# Altium PCB 701C USB Hub.PcbDoc (part 1 of 3)
Units mil, origin at the board's own origin, x right, y up, seen from the top; angles counter-clockwise.
Board outline 4055.12 x 2244.09 mil, 4 copper layers (Component Side, Ground Plane, Power Plane, Solder Side), stack 61 mil thick; 153 components, 125 nets, 650 pads, 241 vias.
Unrouted connection lines stored in the file: 208.
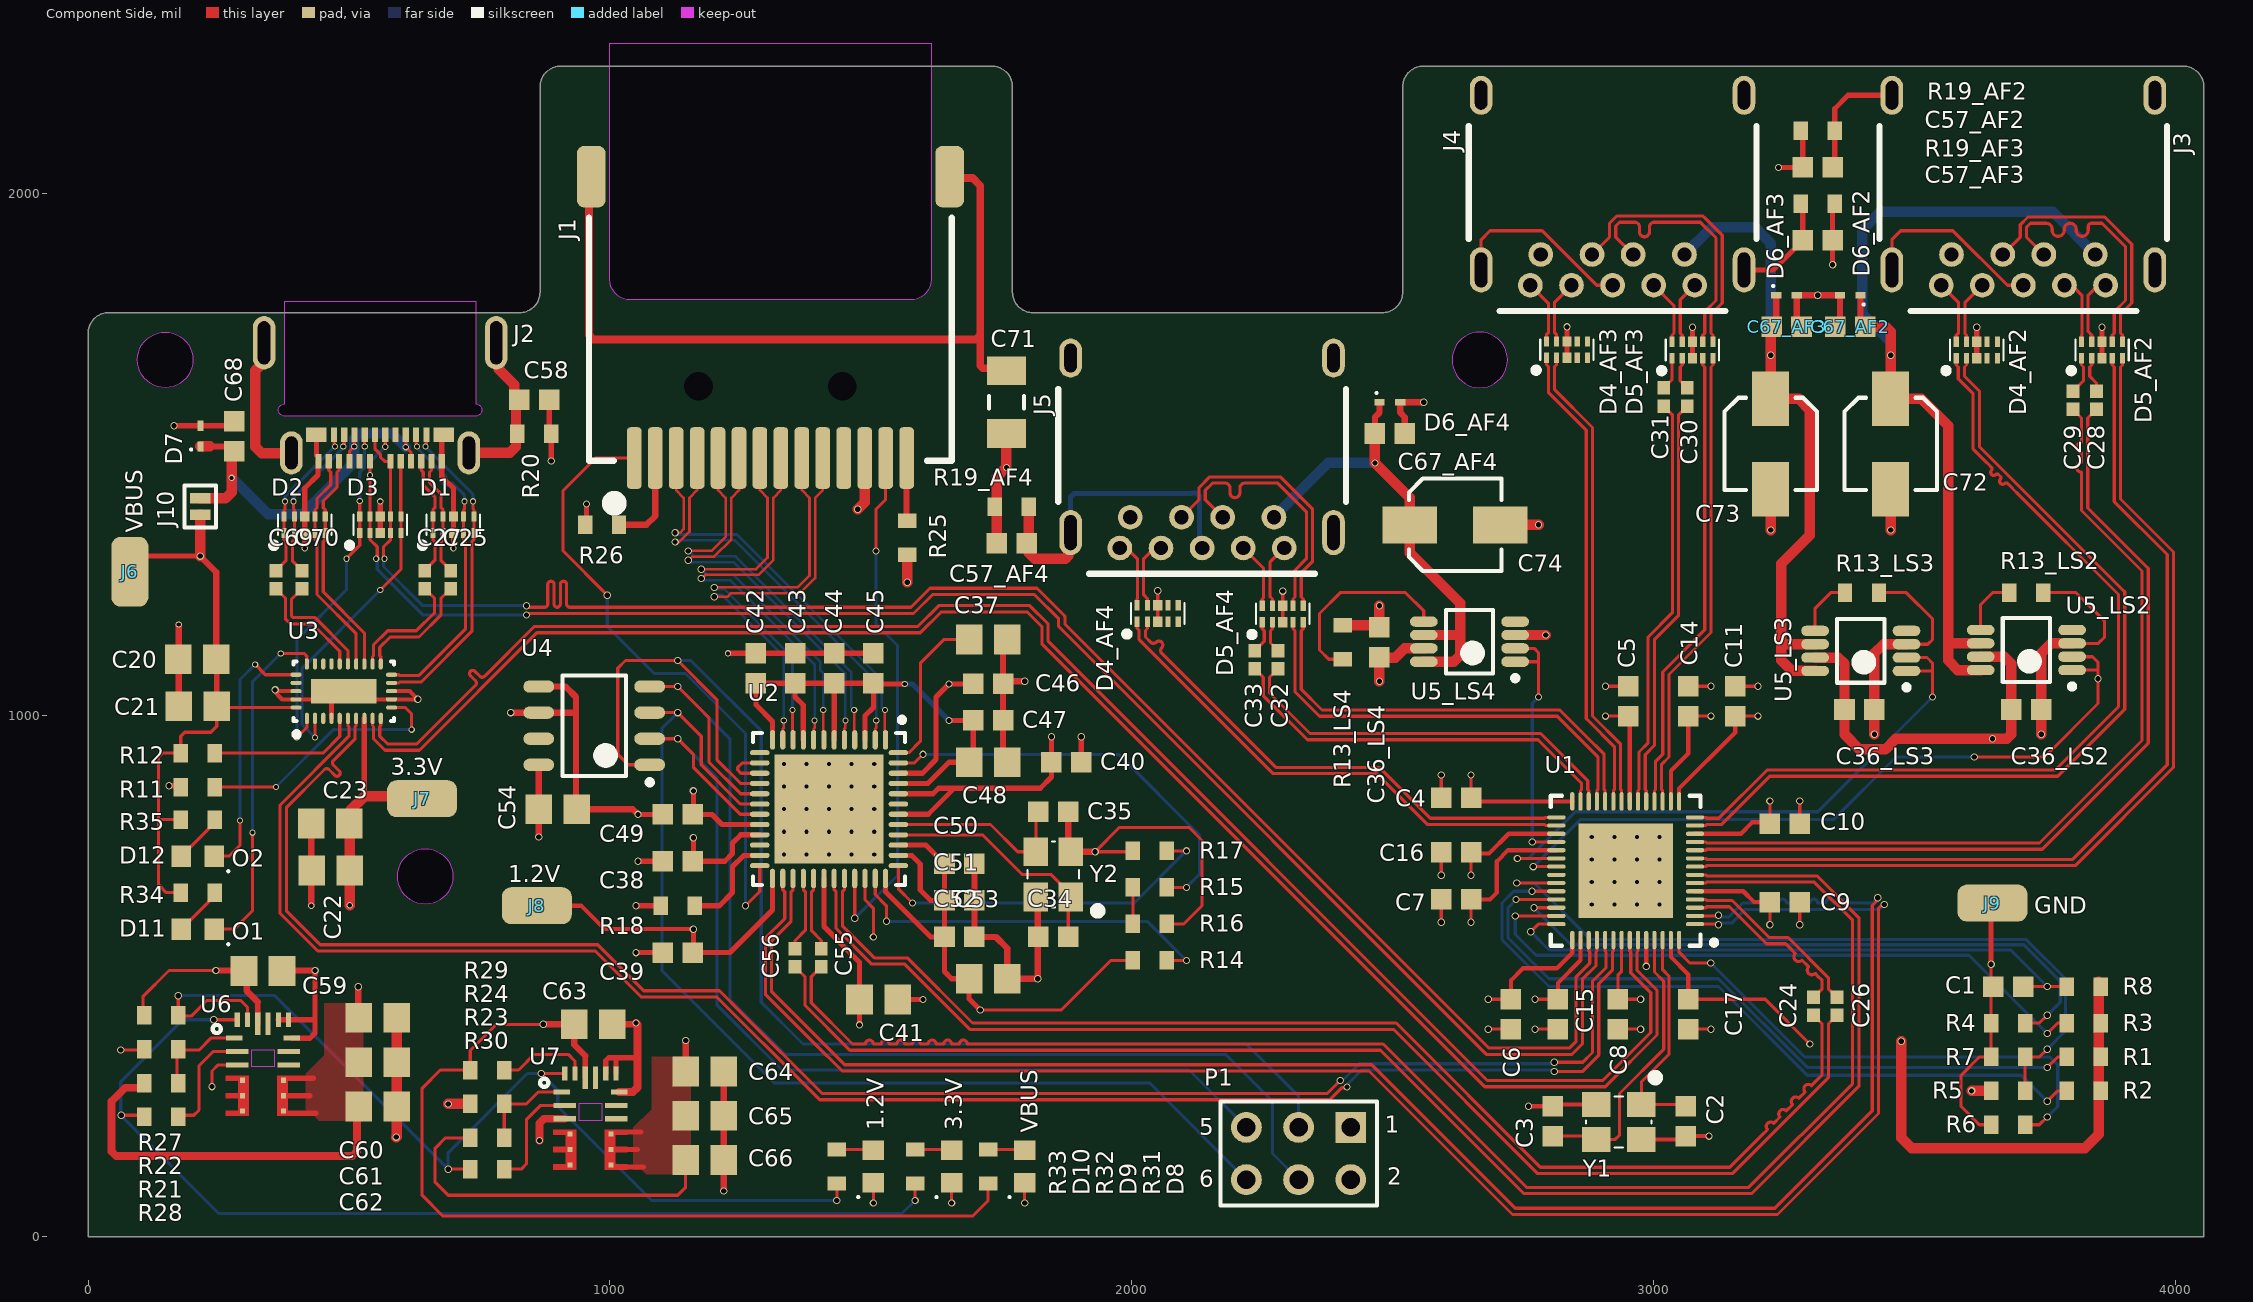
[diagram p0: Component Side view]
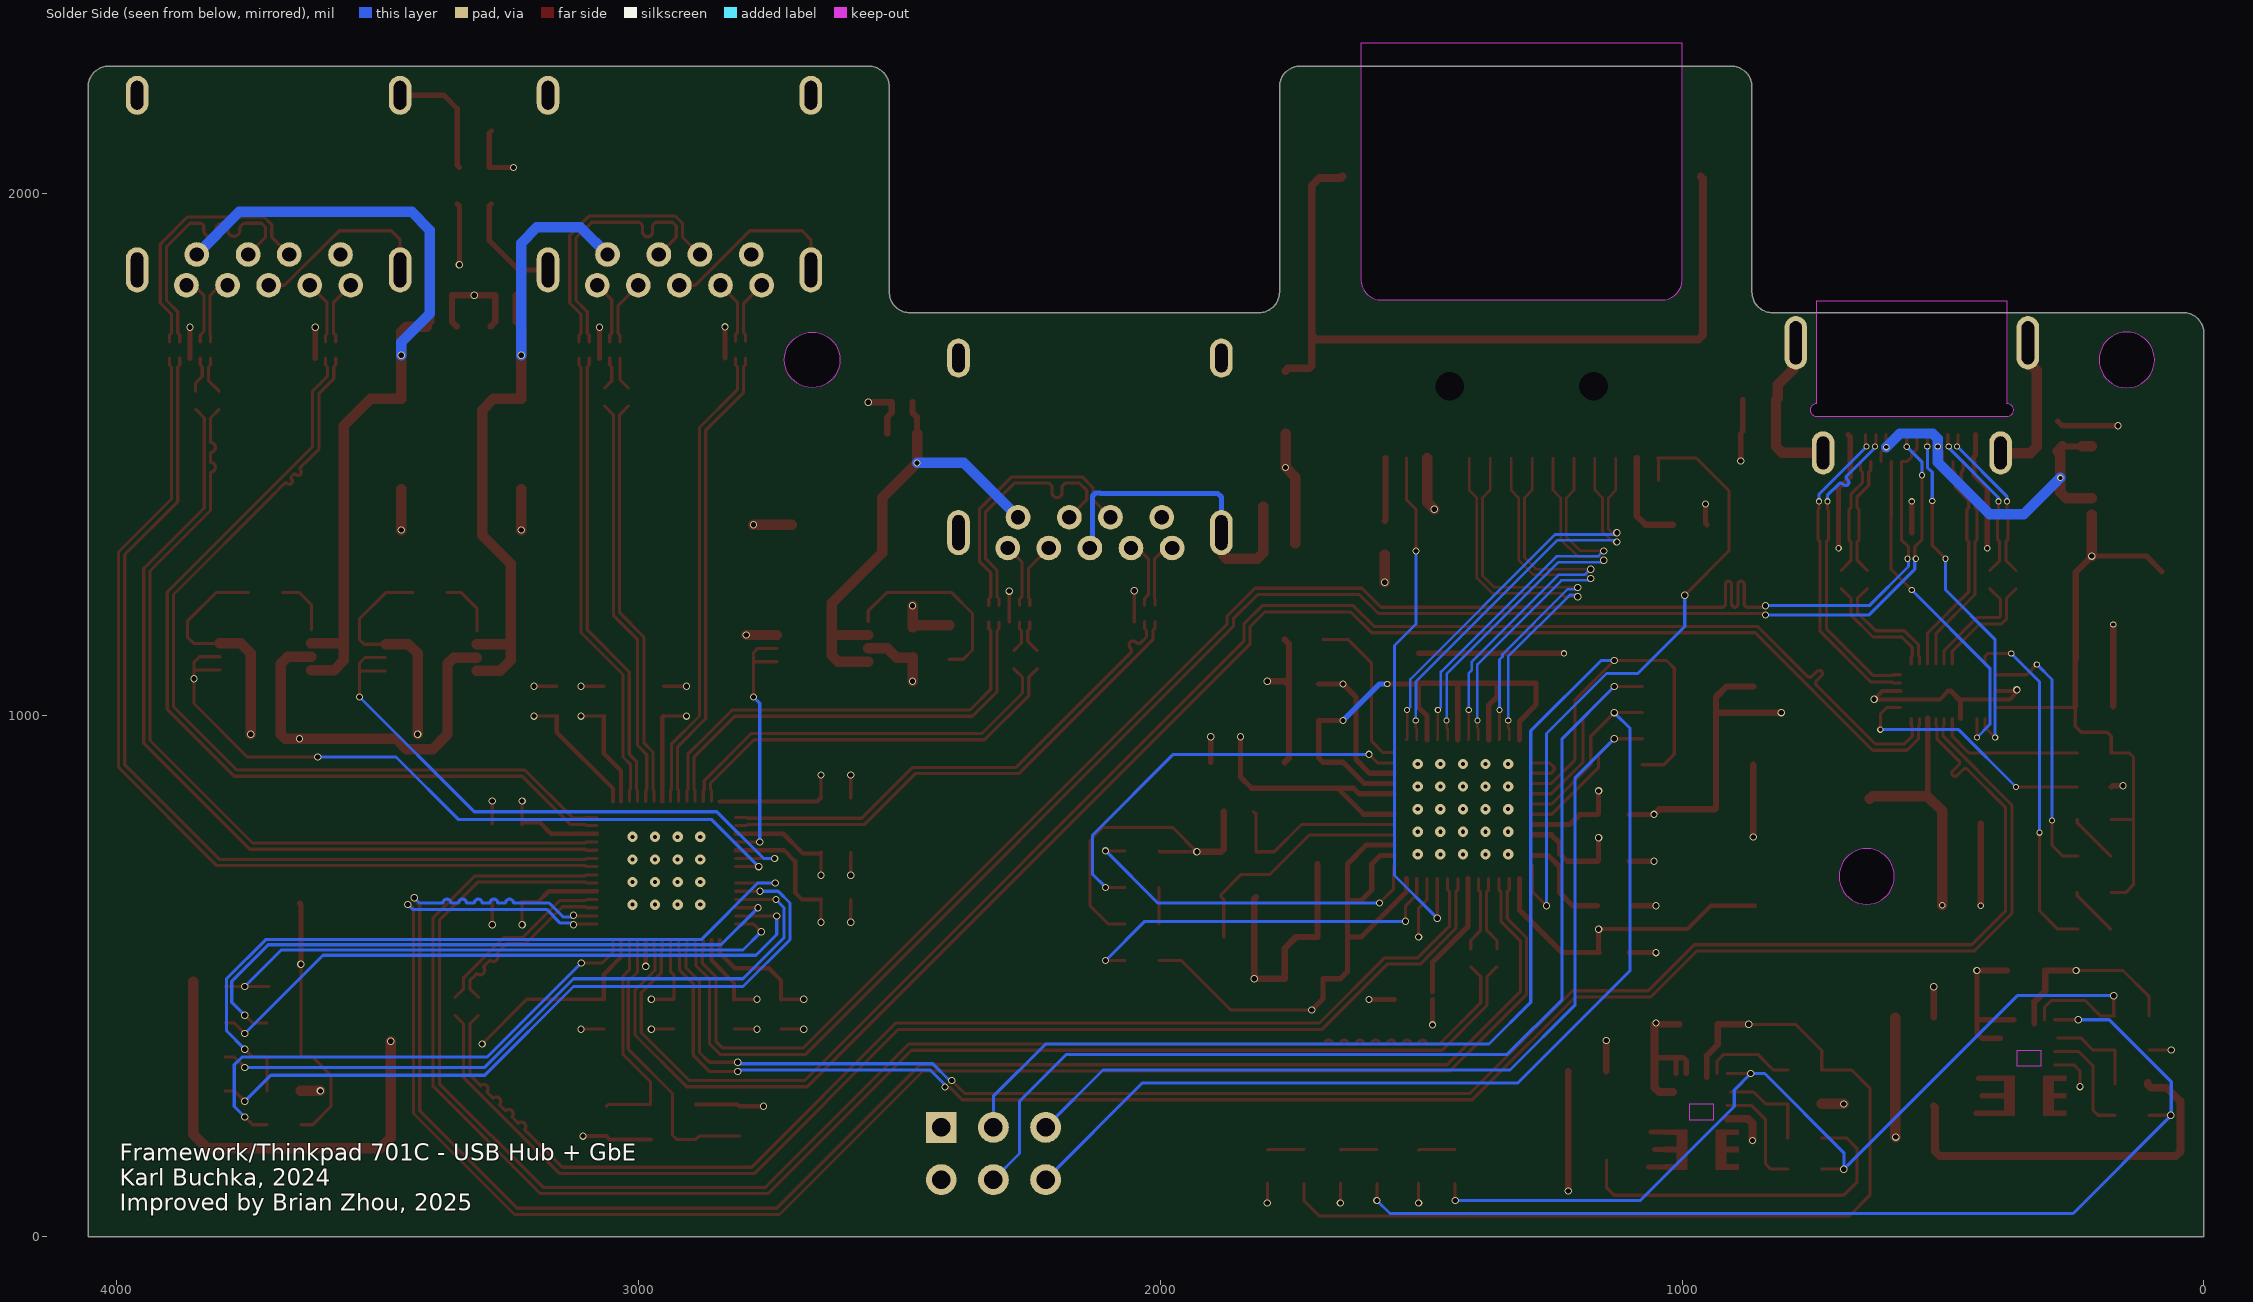
[diagram p1: Solder Side view, seen from below]
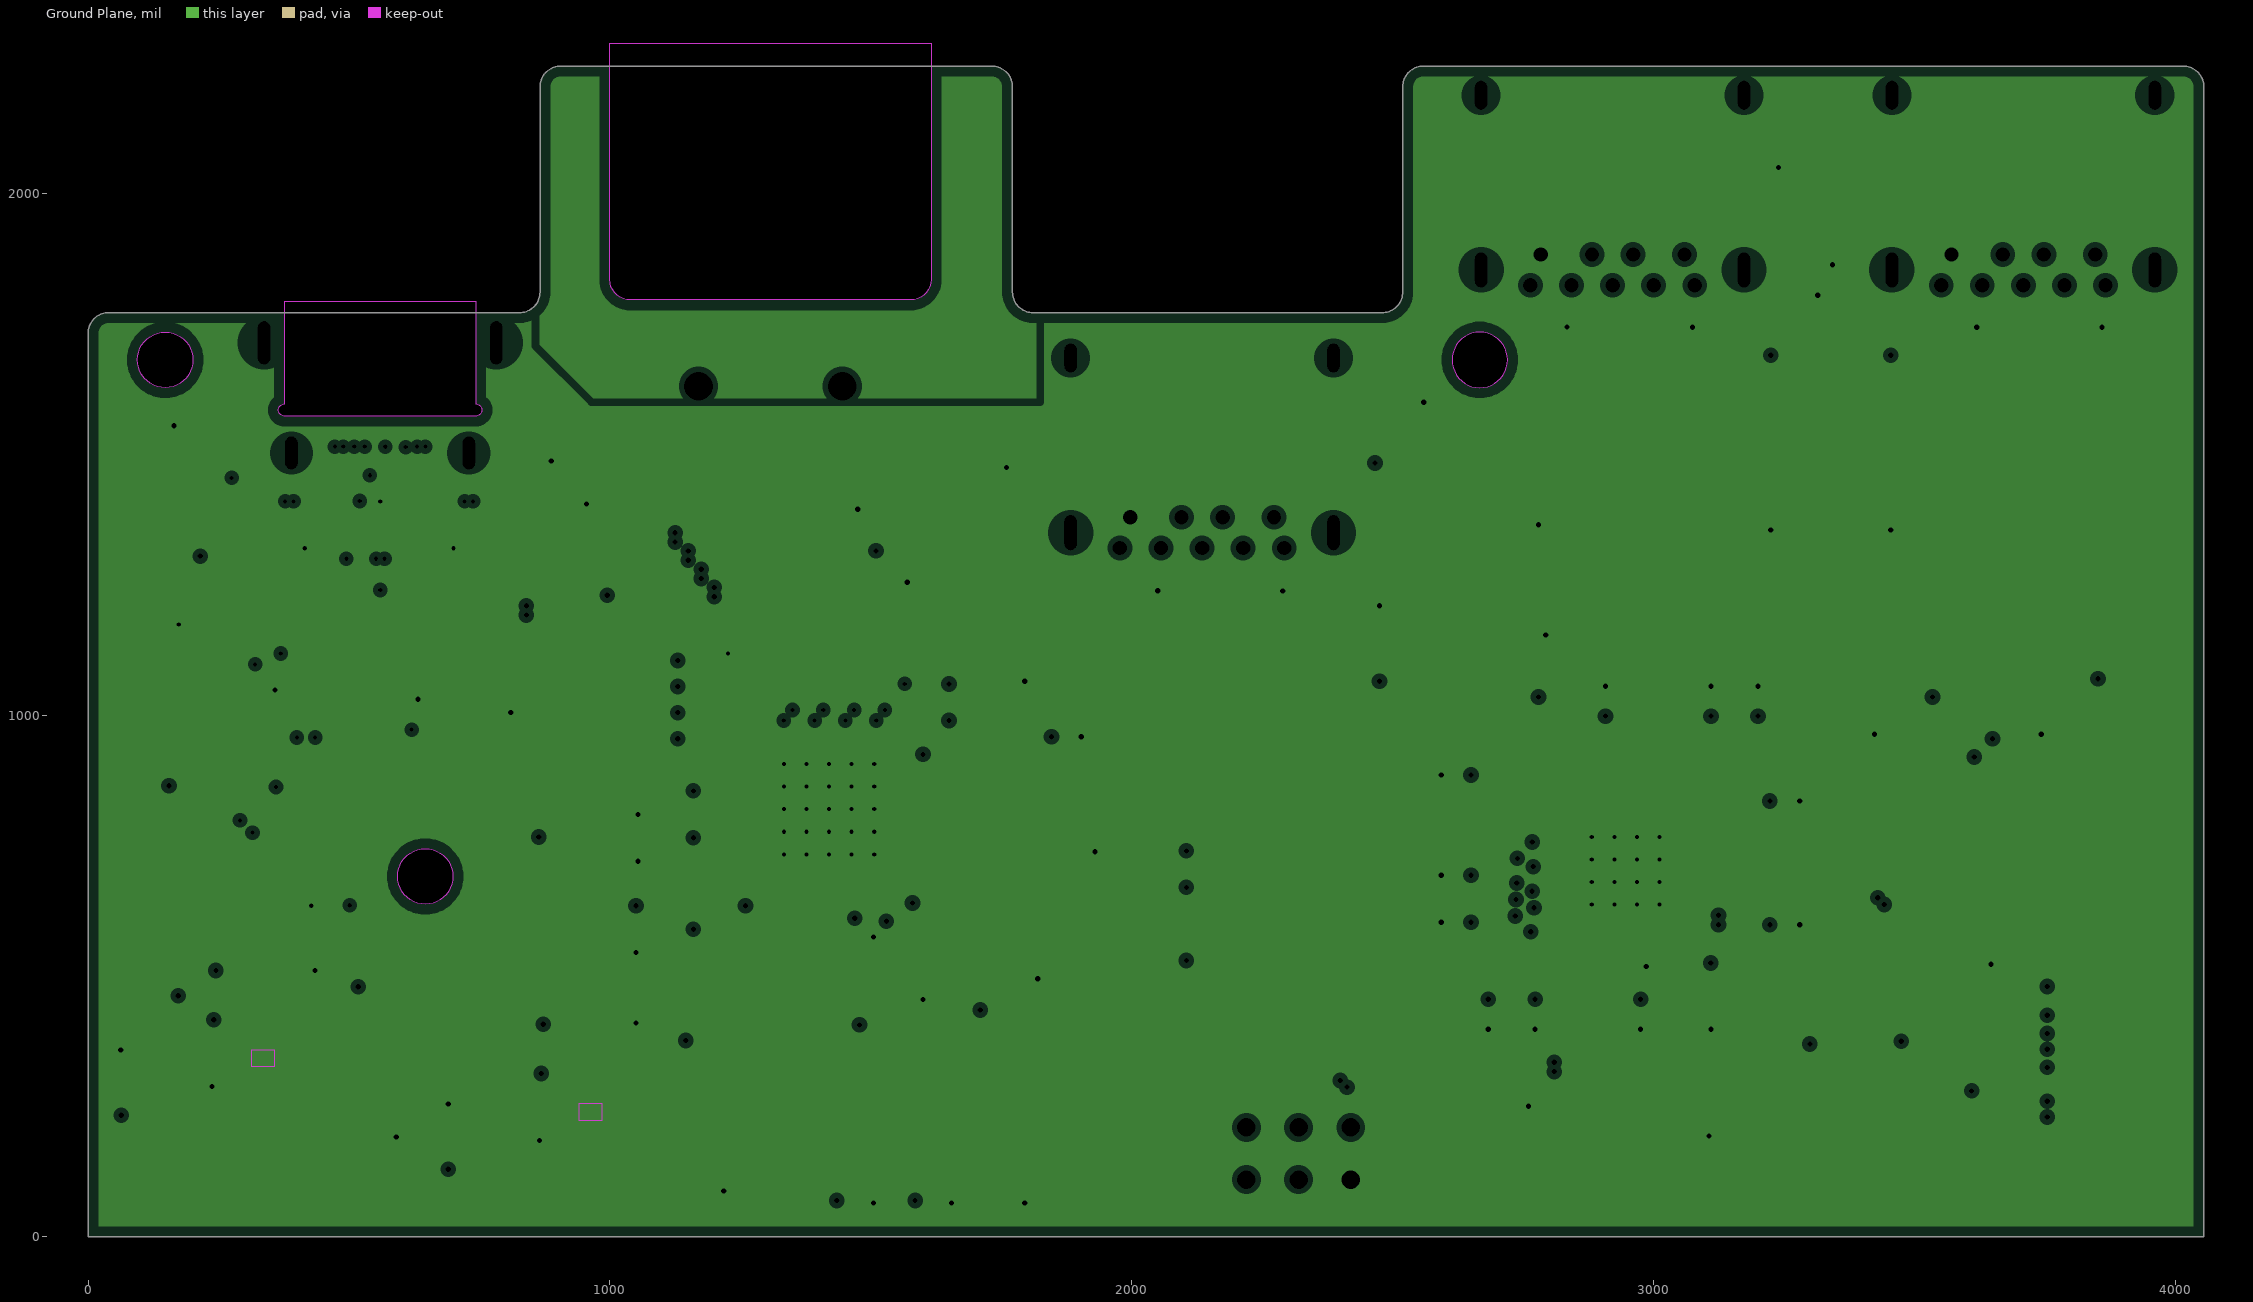
[diagram p2: Ground Plane, clearances drawn from the general rule]
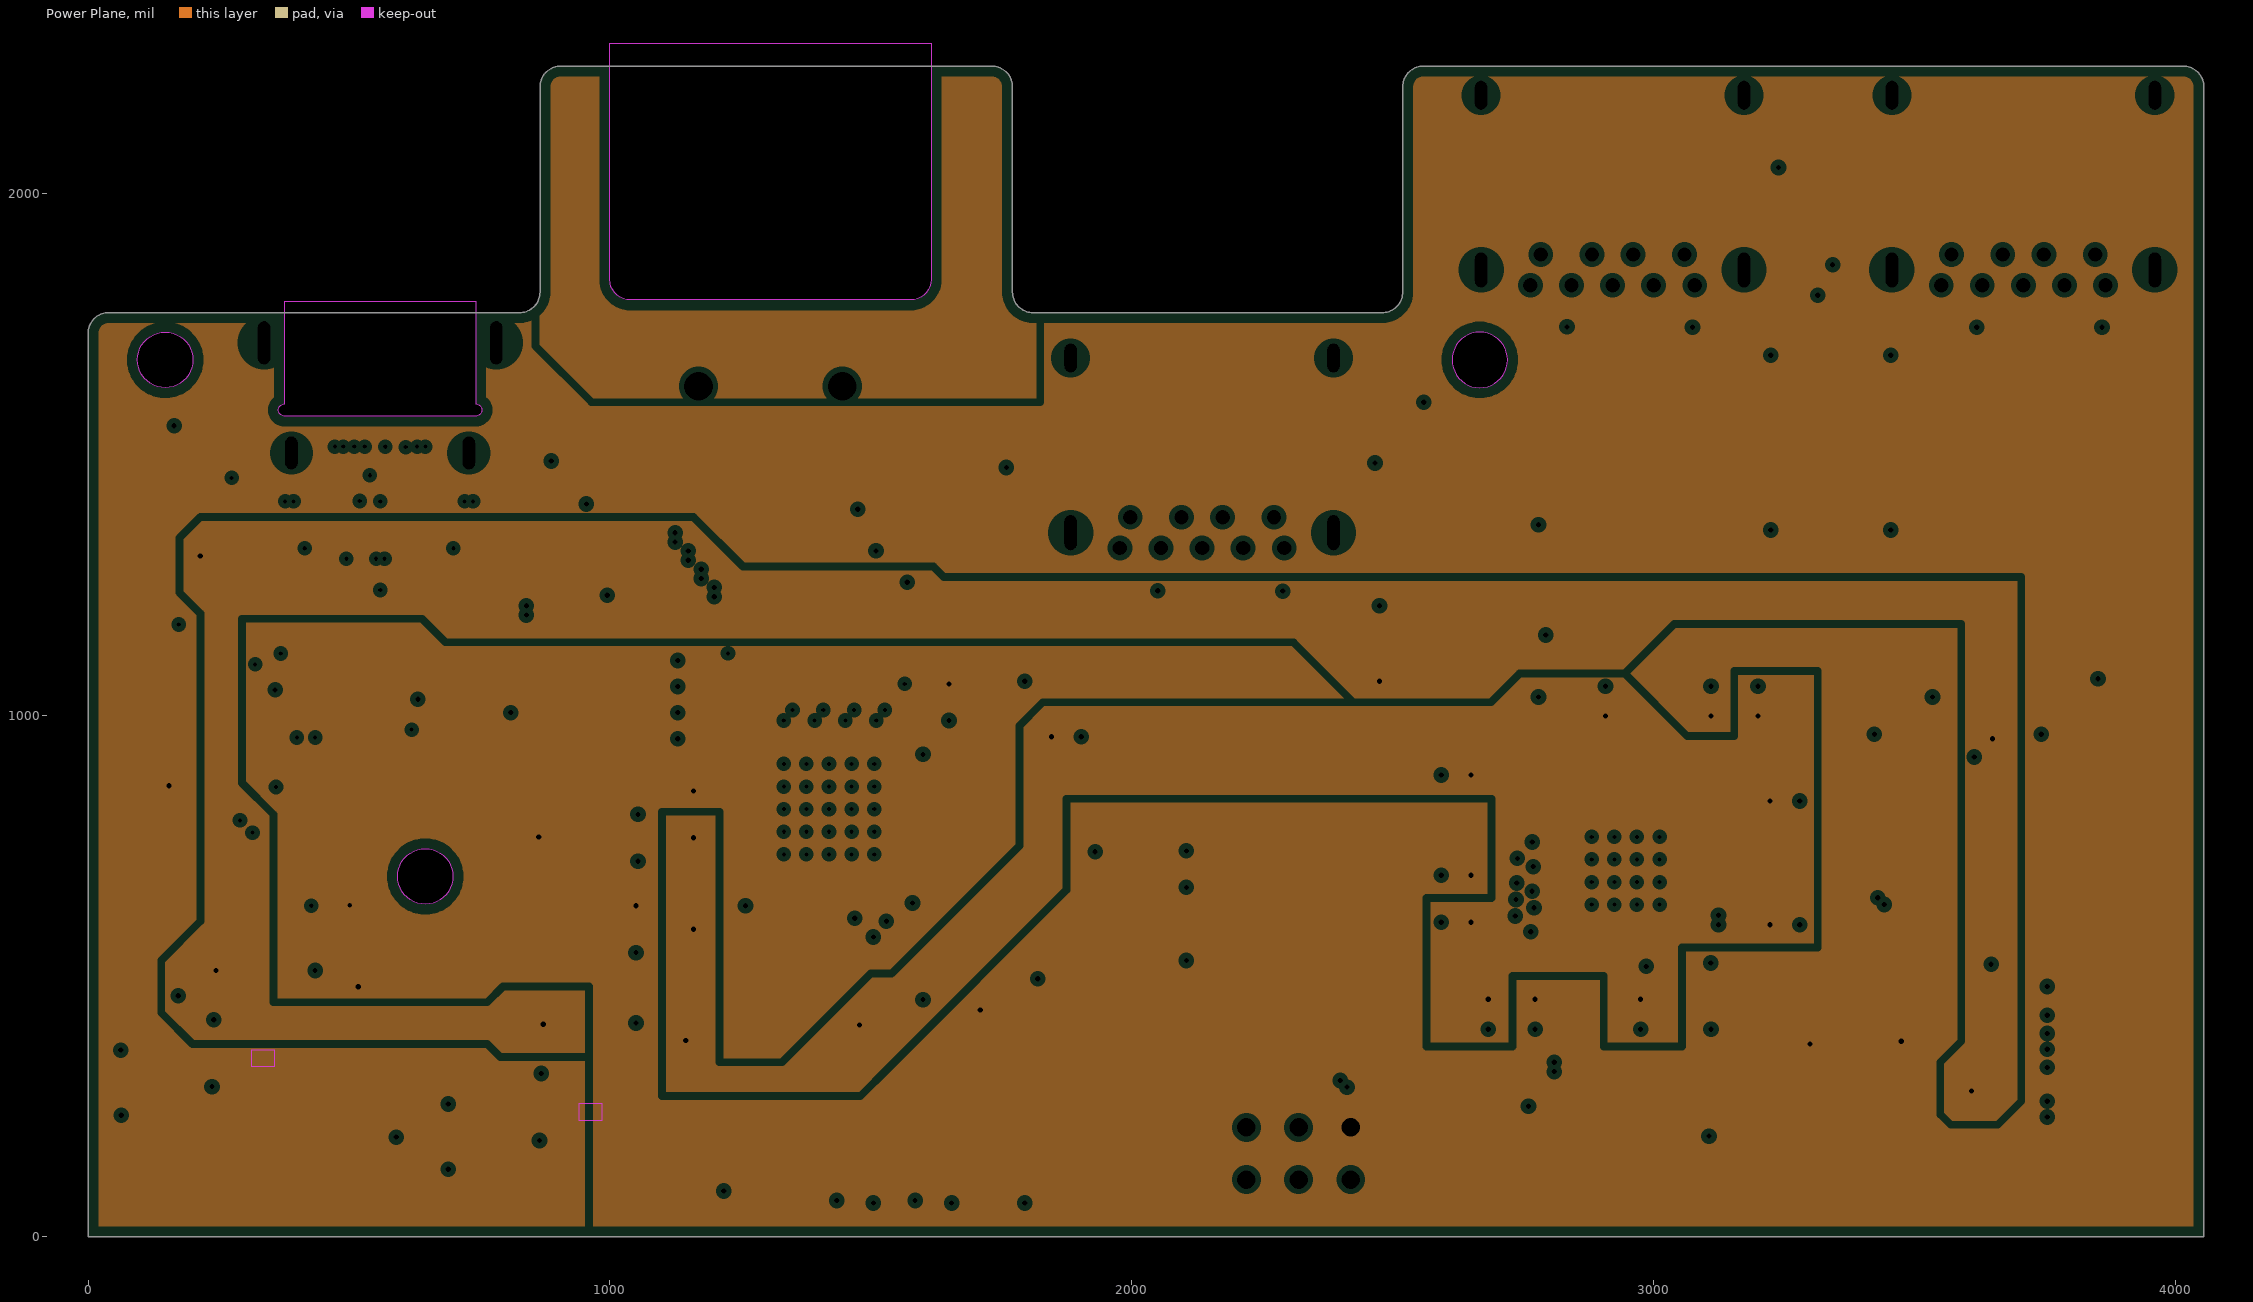
[diagram p3: Power Plane, clearances drawn from the general rule]

## Layer stack, top to bottom
Top Solder: solder mask 0.4, Solder Resist, Dk 3.5
Component Side: signal copper 1.3
Dielectric 1: core 4.3, FR-4, Dk 4.29
Ground Plane: plane copper 1.4, net GND
Dielectric 3: prepreg 47, Dk 4.2
Power Plane: plane copper 1.4, net (Multiple Nets)
Dielectric 4: core 4.3, Dk 4.29
Solder Side: signal copper 1.3
Bottom Solder: solder mask 0.4, Solder Resist, Dk 3.5

## Board outline
0,0 0,1732.28 cw(c39.37,1732.28) 39.37,1771.65 240.16,1771.65 826.77,1771.65 ccw(c826.77,1811.02) 866.14,1811.02 866.14,2204.72 cw(c905.51,2204.72) 905.51,2244.09 1732.28,2244.09 cw(c1732.28,2204.72) 1771.65,2204.72 1771.65,1811.02 ccw(c1811.02,1811.02) 1811.02,1771.65 2480.32,1771.65 ccw(c2480.32,1811.02) 2519.69,1811.02 2519.69,2204.72 cw(c2559.06,2204.72) 2559.06,2244.09 4015.75,2244.09 cw(c4015.75,2204.72) 4055.12,2204.72 4055.12,0
cut-out: 646.1,637.91 cw(c646.1,691.06) 592.95,691.06 cw(c646.1,691.06) 646.1,744.21 cw(c646.1,691.06) 699.25,691.06 cw(c646.1,691.06)
cut-out: 147.64,1627.95 cw(c147.64,1681.1) 94.49,1681.1 cw(c147.64,1681.1) 147.64,1734.25 cw(c147.64,1681.1) 200.79,1681.1 cw(c147.64,1681.1)
cut-out: 2614.17,1681.1 ccw(c2667.32,1681.1) 2667.32,1627.95 ccw(c2667.32,1681.1) 2720.47,1681.1 ccw(c2667.32,1681.1) 2667.32,1734.25 ccw(c2667.32,1681.1)

## Design rules (kind name [scope] priority, off if disabled: settings)
AssemblyTestPointUsage [All] p1 off:
AssemblyTestpoint [All] p1 off: testpointundercomponent=TRUE minsize=40 maxsize=100 preferedsize=60 minholesize=0 maxholesize=40 preferedholesize=32 testpointgrid=1 usegrid=TRUE gridtolerance=0.01 allowsidetop=TRUE allowsidebottom=TRUE
Clearance [All] p1: gap=4 ignorepadtopadclearanceinfootprint=FALSE except(0: Arc-Hole Track-Hole SMDPad-Hole THPad-Hole Via-Hole Fill-Hole Poly-Hole Region-Hole Text-Hole)
ComponentClearance [All] p1 off: gap=10 collisioncheckmode=3 verticalgap=10 showdistances=FALSE
DiffPairsRouting DiffPairsRouting_USB_SS [InNetClass('DIFF90SS')] p1: maxlimit=6 minlimit=4 mostfreqgap=6 toplayer_minwidth=4 toplayer_maxwidth=6 toplayer_prefwidth=6 bottomlayer_minwidth=4 bottomlayer_maxwidth=6 bottomlayer_prefwidth=6 maxuncoupledlength=500
DiffPairsRouting DiffPairsRouting_ENET [InNetClass('DIFF100')] p2: maxlimit=6 minlimit=4 mostfreqgap=6 toplayer_minwidth=4 toplayer_maxwidth=5 toplayer_prefwidth=5 bottomlayer_minwidth=4 bottomlayer_maxwidth=5 bottomlayer_prefwidth=5 maxuncoupledlength=500
DiffPairsRouting DiffPairsRouting_USB_HS [InNetClass('DIFF90HS')] p3: maxlimit=6 minlimit=4 mostfreqgap=6 toplayer_minwidth=4 toplayer_maxwidth=6 toplayer_prefwidth=6 bottomlayer_minwidth=4 bottomlayer_maxwidth=6 bottomlayer_prefwidth=6 maxuncoupledlength=500
DiffPairsRouting [All] p4 off: maxlimit=10 minlimit=10 mostfreqgap=10 toplayer_minwidth=15 toplayer_maxwidth=15 toplayer_prefwidth=15 bottomlayer_minwidth=15 bottomlayer_maxwidth=15 bottomlayer_prefwidth=15 maxuncoupledlength=500
FabricationTestPointUsage [All] p1 off: valid=0 allowmultiple=FALSE
FabricationTestpoint [All] p1 off: side=3 testpointundercomponent=TRUE minsize=40 maxsize=100 preferedsize=60 minholesize=0 maxholesize=40 preferedholesize=32 testpointgrid=1 allowsidetop=TRUE allowsidebottom=TRUE usegrid=TRUE gridtolerance=0.01
Height [All] p1 off: minheight=0 maxheight=1000 prefheight=500
HoleSize [All] p1 off: absolutevalues=TRUE maxlimit=100 minlimit=1 maxpercent=80.000 minpercent=20.000
HoleToHoleClearance [All] p1 off: gap=10 allowstackedmicrovias=TRUE
LayerPairs [All] p1 off: enforce=TRUE
MatchedLengths MatchedLengths_USB_SS [InNetClass('DIFF90SS')] p1 off: tolerance=5 checknetsindiffpair=TRUE checkdiffpairvsdiffpair=FALSE checkxsignals=FALSE checkothers=FALSE
MatchedLengths MatchedLengths_ENET [InNetClass('DIFF100')] p2 off: tolerance=50 checknetsindiffpair=TRUE checkdiffpairvsdiffpair=FALSE checkxsignals=FALSE checkothers=FALSE
MatchedLengths MatchedLengths_USB_HS [InNetClass('DIFF90HS')] p3 off: tolerance=5 checknetsindiffpair=TRUE checkdiffpairvsdiffpair=FALSE checkxsignals=FALSE checkothers=FALSE
MinimumSolderMaskSliver [All] p1 off: minsoldermaskwidth=10
NetAntennae [All] p1 off: netantennaetolerance=0
PlaneClearance [All] p1: clearance=10
PlaneConnect [All] p1: planeconnectstyle=Direct reliefexpansion=20 reliefentries=4 reliefconductorwidth=10 reliefairgap=10
PolygonConnect [All] p1: connectstyle=Direct reliefconductorwidth=10 reliefentries=4 polygonreliefangle="90 Angle" airgapwidth=10
RoutingVias [All] p1: holewidth=10 width=14 viastyle="Through Hole" minholewidth=8 minwidth=1 maxholewidth=16 maxwidth=20
SilkToSilkClearance [All] p1 off: silktosilkclearance=10
SilkToSolderMaskClearance [IsPad] p1 off: minsilkscreentomaskgap=10 clearancetoexposedcopper=TRUE
SolderMaskExpansion [All] p1: expansion=4 istentingtop=FALSE
Width [All] p1: maxlimit=20 minlimit=4 preferedwidth=6 minimp=50.000000 maximp=50.000000 favimp=50.000000
14 further rules are at their usual default settings.

## Classes and differential pairs
differential pair class "UFP SS": UFP_RX1 UFP_RX2 UFP_TX1 UFP_TX1b UFP_TX2 UFP_TX2b
differential pair class "UFP HS": UFP_D
differential pair class "MUX to Hub": MUX_RX MUX_TX
differential pair class ENET: TR0 TR1 TR2 TR3
net class DIFF100: TR0_N TR0_P TR1_N TR1_P TR2_N TR2_P TR3_N TR3_P
net class DIFF90HS: DFP1_D_N DFP1_D_P DFP2_D_N DFP2_D_P DFP3_D_N DFP3_D_P DFP4_D_N DFP4_D_P UFP_D_N UFP_D_P
net class DIFF90SS: DFP1_RXa_N DFP1_RXa_P DFP1_RXb_N DFP1_RXb_P DFP1_TXa_N DFP1_TXa_P DFP1_TXb_N DFP1_TXb_P DFP2_RX_N DFP2_RX_P DFP2_TXa_N DFP2_TXa_P DFP2_TXb_N DFP2_TXb_P DFP3_RX_N DFP3_RX_P DFP3_TXa_N DFP3_TXa_P DFP3_TXb_N DFP3_TXb_P DFP4_RX_N DFP4_RX_P DFP4_TXa_N DFP4_TXa_P DFP4_TXb_N DFP4_TXb_P MUX_RX_N MUX_RX_P MUX_TX_N MUX_TX_P UFP_RX1_N UFP_RX1_P UFP_RX2_N UFP_RX2_P UFP_TX1_N UFP_TX1_P UFP_TX1b_N UFP_TX1b_P UFP_TX2_N UFP_TX2_P UFP_TX2b_N UFP_TX2b_P
channel class "USB A Filter": AF2 AF3 AF4
channel class "Load Switch": LS2 LS3 LS4
component class CF: C58 C68 D1 D2 D3 D7 J10 R20
component class AF4: C57_AF4 C67_AF4 D4_AF4 D5_AF4 D6_AF4 R19_AF4
component class AF3: C57_AF3 C67_AF3 D4_AF3 D5_AF3 D6_AF3 R19_AF3
component class AF2: C57_AF2 C67_AF2 D4_AF2 D5_AF2 D6_AF2 R19_AF2
component class U_Power: C59 C60 C61 C62 C63 C64 C65 C66 R21 R22 R23 R24 R27 R28 R29 R30 U6 U7
component class U_MUX: C20 C21 C22 C23 R11 R12 U3
component class LS4: C36_LS4 R13_LS4 U5_LS4
component class LS3: C36_LS3 R13_LS3 U5_LS3
component class LS2: C36_LS2 R13_LS2 U5_LS2
component class U_LAN: C34 C35 C37 C38 C39 C40 C41 C42 C43 C44 C45 C46 C47 C48 C49 C50 C51 C52 C53 C54 P1 R14 R15 R16 R17 R18 U2 U4 Y2
component class U_Hub: C1 C2 C3 C4 C5 C6 C7 C8 C9 C10 C11 C14 C15 C16 C17 R1 R2 R3 R4 R5 R6 R7 R8 U1 Y1
component class "Top Level": C24 C25 C26 C27 C28 C29 C30 C31 C32 C33 C55 C56 C69 C70 C71 C72 C73 C74 D8 D9 D10 D11 D12 J1 J2 J3 J4 J5 J6 J7 J8 J9 R25 R26 R31 R32 R33 R34 R35
differential pair DFP4_RX: +DFP4_RX_P -DFP4_RX_N
differential pair DFP1_RXa: +DFP1_RXa_P -DFP1_RXa_N
differential pair DFP1_RXb: +DFP1_RXb_P -DFP1_RXb_N
differential pair DFP2_RX: +DFP2_RX_P -DFP2_RX_N
differential pair TR3: +TR3_P -TR3_N
differential pair TR2: +TR2_P -TR2_N
differential pair TR1: +TR1_P -TR1_N
differential pair TR0: +TR0_P -TR0_N
differential pair UFP_TX2b: +UFP_TX2b_P -UFP_TX2b_N
differential pair UFP_TX1b: +UFP_TX1b_P -UFP_TX1b_N
differential pair MUX_TX: +MUX_TX_P -MUX_TX_N
differential pair MUX_RX: +MUX_RX_P -MUX_RX_N
differential pair DFP4_TXb: +DFP4_TXb_P -DFP4_TXb_N
differential pair DFP1_TXa: +DFP1_TXa_P -DFP1_TXa_N
differential pair DFP1_D: +DFP1_D_P -DFP1_D_N
differential pair DFP3_TXb: +DFP3_TXb_P -DFP3_TXb_N
differential pair DFP4_TXa: +DFP4_TXa_P -DFP4_TXa_N
differential pair DFP4_D: +DFP4_D_P -DFP4_D_N
differential pair DFP2_TXb: +DFP2_TXb_P -DFP2_TXb_N
differential pair DFP3_TXa: +DFP3_TXa_P -DFP3_TXa_N
differential pair DFP3_RX: +DFP3_RX_P -DFP3_RX_N
differential pair DFP3_D: +DFP3_D_P -DFP3_D_N
differential pair DFP1_TXb: +DFP1_TXb_P -DFP1_TXb_N
differential pair DFP2_TXa: +DFP2_TXa_P -DFP2_TXa_N
differential pair DFP2_D: +DFP2_D_P -DFP2_D_N
differential pair UFP_TX2: +UFP_TX2_P -UFP_TX2_N
differential pair UFP_RX2: +UFP_RX2_P -UFP_RX2_N
differential pair UFP_TX1: +UFP_TX1_P -UFP_TX1_N
differential pair UFP_RX1: +UFP_RX1_P -UFP_RX1_N
differential pair UFP_D: +UFP_D_P -UFP_D_N

## Components (designator, comment, footprint, x,y, rotation, side; value= is the part's Value field where it differs from the comment)
C1 "100nF" CAP_SM0603_YAGEOCC2_N 3680,480 r180 top
C2 "10pF" CAP_SM0603_YAGEOCC2_N 3061.97,221.97 r90 top
C3 "10pF" CAP_SM0603_YAGEOCC2_N 2806.97,221.97 r270 top
C4 "100nF" CAP_SM0603_YAGEOCC2_N 2621.97,841.97 r180 top
C5 "100nF" CAP_SM0603_YAGEOCC2_N 2951.97,1026.97 r90 top
C6 "100nF" CAP_SM0603_YAGEOCC2_N 2726.97,426.97 r270 top
C7 "100nF" CAP_SM0603_YAGEOCC2_N 2621.97,646.97 r180 top
C8 "100nF" CAP_SM0603_YAGEOCC2_N 2931.97,426.97 r270 top
C9 "100nF" CAP_SM0603_YAGEOCC2_N 3251.97,641.97 r0 top
C10 "100nF" CAP_SM0603_YAGEOCC2_N 3251.97,791.97 r0 top
C11 "100nF" CAP_SM0603_YAGEOCC2_N 3156.97,1026.97 r90 top
C14 "100nF" CAP_SM0603_YAGEOCC2_N 3066.97,1026.97 r90 top
C15 "100nF" CAP_SM0603_YAGEOCC2_N 2816.97,426.97 r270 top
C16 "100nF" CAP_SM0603_YAGEOCC2_N 2621.97,736.97 r180 top
C17 "100nF" CAP_SM0603_YAGEOCC2_N 3066.97,426.97 r270 top
C20 "1uF" CAP_SM0805_YAGEOCC2_N 209.02,1107.44 r180 top
C21 "1uF" CAP_SM0805_YAGEOCC2_N 210,1017.44 r180 top
C22 "1uF" CAP_SM0805_YAGEOCC2_N 465,702.44 r180 top
C23 "1uF" CAP_SM0805_YAGEOCC2_N 464.02,792.44 r180 top
C24 "100nF" CAP_SM0402_YAGEOCA2_N 3306.97,441.97 r270 top
C25 "100nF" CAP_SM0402_YAGEOCA2_N 695,1260 r270 top
C26 "100nF" CAP_SM0402_YAGEOCA2_N 3351.97,441.97 r270 top
C27 "100nF" CAP_SM0402_YAGEOCA2_N 645,1260 r270 top
C28 "100nF" CAP_SM0402_YAGEOCA2_N 3849.21,1603.55 r90 top
C29 "100nF" CAP_SM0402_YAGEOCA2_N 3804.21,1603.55 r90 top
C30 "100nF" CAP_SM0402_YAGEOCA2_N 3065,1610 r90 top
C31 "100nF" CAP_SM0402_YAGEOCA2_N 3020,1610 r90 top
C32 "100nF" CAP_SM0402_YAGEOCA2_N 2280.79,1106.45 r90 top
C33 "100nF" CAP_SM0402_YAGEOCA2_N 2235.79,1106.45 r90 top
C34 "10pF" CAP_SM0603_YAGEOCC2_N 1850,575 r180 top
C35 "10pF" CAP_SM0603_YAGEOCC2_N 1850,815 r0 top
C36_LS2 "100nF" CAP_SM0603_YAGEOCC2_N 3715,1011 r0 top (schematic designator C36)
C36_LS3 "100nF" CAP_SM0603_YAGEOCC2_N 3395,1011 r0 top (schematic designator C36)
C36_LS4 "100nF" CAP_SM0603_YAGEOCC2_N 2475,1140 r90 top (schematic designator C36)
C37 "1uF" CAP_SM0805_YAGEOCC2_N 1725,1145 r0 top
C38 "100nF" CAP_SM0603_YAGEOCC2_N 1130,720 r180 top
C39 "100nF" CAP_SM0603_YAGEOCC2_N 1130,545 r180 top
C40 "100nF" CAP_SM0603_YAGEOCC2_N 1875,910 r0 top
C41 "1uF" CAP_SM0805_YAGEOCC2_N 1515,455 r0 top
C42 "100nF" CAP_SM0603_YAGEOCC2_N 1280,1090 r90 top
C43 "100nF" CAP_SM0603_YAGEOCC2_N 1355,1090 r90 top
C44 "100nF" CAP_SM0603_YAGEOCC2_N 1430,1090 r90 top
C45 "100nF" CAP_SM0603_YAGEOCC2_N 1505,1090 r90 top
C46 "100nF" CAP_SM0603_YAGEOCC2_N 1725,1060 r0 top
C47 "100nF" CAP_SM0603_YAGEOCC2_N 1725,990 r0 top
C48 "1uF" CAP_SM0805_YAGEOCC2_N 1725,910 r0 top
C49 "100nF" CAP_SM0603_YAGEOCC2_N 1130,810 r180 top
C50 "100nF" CAP_SM0603_YAGEOCC2_N 1670,715 r0 top
C51 "100nF" CAP_SM0603_YAGEOCC2_N 1670,645 r0 top
C52 "100nF" CAP_SM0603_YAGEOCC2_N 1670,575 r0 top
C53 "1uF" CAP_SM0805_YAGEOCC2_N 1725,495 r0 top
C54 "1uF" CAP_SM0805_YAGEOCC2_N 900,820 r0 top
C55 "100nF" CAP_SM0402_YAGEOCA2_N 1405,535 r90 top
C56 "100nF" CAP_SM0402_YAGEOCA2_N 1355,535 r90 top
C57_AF2 "100nF" CAP_SM0603_YAGEOCC2_N 3315,2050 r180 top (schematic designator C57)
C57_AF3 "100nF" CAP_SM0603_YAGEOCC2_N 3315,1910 r0 top (schematic designator C57)
C57_AF4 "100nF" CAP_SM0603_YAGEOCC2_N 1770,1330 r180 top (schematic designator C57)
C58 "100nF" CAP_SM0603_YAGEOCC2_N 855,1605 r0 top
C59 "2.2uF" CAP_SM0805_YAGEOCC2_N 335,510 r0 top
C60 "2.2uF" CAP_SM0805_YAGEOCC2_N 555,420 r0 top
C61 "2.2uF" CAP_SM0805_YAGEOCC2_N 555,335 r0 top
C62 "2.2uF" CAP_SM0805_YAGEOCC2_N 555,250 r0 top
C63 "2.2uF" CAP_SM0805_YAGEOCC2_N 968.27,407.6 r0 top
C64 "2.2uF" CAP_SM0805_YAGEOCC2_N 1181.73,317.4 r0 top
C65 "2.2uF" CAP_SM0805_YAGEOCC2_N 1181.73,232.4 r0 top
C66 "2.2uF" CAP_SM0805_YAGEOCC2_N 1181.73,147.4 r0 top
C67_AF2 "100nF" CAP_SM0603_YAGEOCC2_N 3377.44,1745 r180 top (schematic designator C67)
C67_AF3 "100nF" CAP_SM0603_YAGEOCC2_N 3255.31,1745 r0 top (schematic designator C67)
C67_AF4 "100nF" CAP_SM0603_YAGEOCC2_N 2495,1540 r0 top (schematic designator C67)
C68 "100nF" CAP_SM0603_YAGEOCC2_N 280,1535 r90 top
C69 "100nF" CAP_SM0402_YAGEOCA2_N 360,1260 r270 top
C70 "100nF" CAP_SM0402_YAGEOCA2_N 410,1260 r270 top
C71 "2200pF" CAP_SM1206_YAGEOCC2_N 1760,1600 r270 top
C72 "EEE-FT1E330AR" "CAPAE5543X61M - EEE-FT1E330AR" 3455,1520 r270 top value=33uF
C73 "EEE-FT1E330AR" "CAPAE5543X61M - EEE-FT1E330AR" 3225,1520 r270 top value=33uF
C74 "EEE-FT1E330AR" "CAPAE5543X61M - EEE-FT1E330AR" 2620,1365 r0 top value=33uF
D1 "ESD8004MUTAG" ESD8004MUTAG 700,1365 r0 top
D2 "ESD8004MUTAG" ESD8004MUTAG 415,1365 r0 top
D3 "ESD8004MUTAG" ESD8004MUTAG 560,1365 r0 top
D4_AF2 "ESD8004MUTAG" ESD8004MUTAG 3620,1700 r0 top (schematic designator D4)
D4_AF3 "ESD8004MUTAG" ESD8004MUTAG 2834.37,1700.75 r0 top (schematic designator D4)
D4_AF4 "ESD8004MUTAG" ESD8004MUTAG 2050,1195 r0 top (schematic designator D4)
D5_AF2 "ESD8004MUTAG" ESD8004MUTAG 3860,1700 r0 top (schematic designator D5)
D5_AF3 "ESD8004MUTAG" ESD8004MUTAG 3075,1700 r0 top (schematic designator D5)
D5_AF4 "ESD8004MUTAG" ESD8004MUTAG 2289.68,1194.25 r0 top (schematic designator D5)
D6_AF2 "ESD9C5.0ST5G" "SODFL100X40-2N - ESD9C5.0ST5G" 3377.44,1805 r180 top (schematic designator D6)
D6_AF3 "ESD9C5.0ST5G" "SODFL100X40-2N - ESD9C5.0ST5G" 3255.31,1805 r0 top (schematic designator D6)
D6_AF4 "ESD9C5.0ST5G" "SODFL100X40-2N - ESD9C5.0ST5G" 2495,1600 r0 top (schematic designator D6)
D7 "ESD9C5.0ST5G" "SODFL100X40-2N - ESD9C5.0ST5G" 215,1535 r90 top
D8 "SML-LXFM0603SUGCTR" "DIOC1608X11N - SML-LXFM0603SUGCTR" 1795,135 r270 top
D9 "SML-LXFM0603SUGCTR" "DIOC1608X11N - SML-LXFM0603SUGCTR" 1655,135 r270 top
D10 "SML-LXFM0603SUGCTR" "DIOC1608X11N - SML-LXFM0603SUGCTR" 1505,135 r270 top
D11 "SML-LXFM0603SUGCTR" "DIOC1608X11N - SML-LXFM0603SUGCTR" 210,590 r0 top
D12 "SML-LXFM0603SUGCTR" "DIOC1608X11N - SML-LXFM0603SUGCTR" 210,730 r0 top
J1 "7498111120R" 7498111120R 1307.68,1630.75 r0 top
J2 "1054550101" 1054550101 559.64,1537.84 r180 top
J3 "0483930003" 0483930003 3709.25,1853.59 r180 top
J4 "0483930003" 0483930003 2921.85,1853.59 r180 top
J5 "0483930003" 0483930003 2135.04,1350.04 r180 top
J6 "RCS-0C" RCS-0C 80,1275 r0 top
J7 "RCS-0C" RCS-0C 640,840 r90 top
J8 "RCS-0C" RCS-0C 860,635 r90 top
J9 "RCS-0C" RCS-0C 3650,640 r270 top
J10 "Jumper SMD 2" "Jumper SMD 2" 215,1400 r90 top
P1 "Header 3X2" HDR2X3 2420,210 r180 top
R1 "10K" RES_SM0603_YAGEORC_N 3825,345 r180 top
R2 "10K" RES_SM0603_YAGEORC_N 3825,280 r180 top
R3 "200K" RES_SM0603_YAGEORC_N 3825,410 r180 top
R4 "200K" RES_SM0603_YAGEORC_N 3680,410 r0 top
R5 "39K" RES_SM0603_YAGEORC_N 3680,280 r180 top
R6 "12K" RES_SM0603_YAGEORC_N 3680,215 r0 top
R7 "82K" RES_SM0603_YAGEORC_N 3680,345 r0 top
R8 "10K" RES_SM0603_YAGEORC_N 3825,480 r0 top
R11 "220K" RES_SM0603_YAGEORC_N 210,862.44 r180 top
R12 "909K" RES_SM0603_YAGEORC_N 210,927.44 r180 top
R13_LS2 "270R" RES_SM0603_YAGEORC_N 3715,1235 r180 top (schematic designator R13)
R13_LS3 "270R" RES_SM0603_YAGEORC_N 3400,1235 r180 top (schematic designator R13)
R13_LS4 "270R" RES_SM0603_YAGEORC_N 2405,1140 r270 top (schematic designator R13)
R14 "12K" RES_SM0603_YAGEORC_N 2035,530 r180 top
R15 "1K" RES_SM0603_YAGEORC_N 2035,670 r180 top
R16 "1K" RES_SM0603_YAGEORC_N 2035,600 r0 top
R17 "12K" RES_SM0603_YAGEORC_N 2035,740 r0 top
R18 "12K" RES_SM0603_YAGEORC_N 1130,635 r180 top
R19_AF2 "330R" RES_SM0603_YAGEORC_N 3315,2120 r0 top (schematic designator R19)
R19_AF3 "330R" RES_SM0603_YAGEORC_N 3315,1980 r180 top (schematic designator R19)
R19_AF4 "330R" RES_SM0603_YAGEORC_N 1770,1400 r0 top (schematic designator R19)
R20 "330R" RES_SM0603_YAGEORC_N 855,1540 r180 top
R21 "68K" RES_SM0603_YAGEORC_N 140,295 r180 top
R22 "22K" RES_SM0603_YAGEORC_N 140,360 r0 top
R23 "56K" RES_SM0603_YAGEORC_N 765,190 r180 top
R24 "120K" RES_SM0603_YAGEORC_N 765,255 r0 top
R25 "220R" RES_SM0603_YAGEORC_N 1570,1340 r90 top
R26 "220R" RES_SM0603_YAGEORC_N 985,1365 r0 top
R27 "120K" RES_SM0603_YAGEORC_N 140,425 r0 top
R28 "120K" RES_SM0603_YAGEORC_N 140,230 r180 top
R29 "120K" RES_SM0603_YAGEORC_N 765,320 r0 top
R30 "120K" RES_SM0603_YAGEORC_N 765,130 r180 top
R31 "1K5" RES_SM0603_YAGEORC_N 1725,135 r90 top
R32 "1K5" RES_SM0603_YAGEORC_N 1585,135 r90 top
R33 "1K5" RES_SM0603_YAGEORC_N 1435,135 r90 top
R34 "1K5" RES_SM0603_YAGEORC_N 210,660 r0 top
R35 "1K5" RES_SM0603_YAGEORC_N 210,800 r0 top
U1 "USB5744/2G abc" "QFN40P700X700X100_HS-57N - USB5744/2G" 2946.97,701.97 r180 top
U2 "LAN7800/Y9X" "QFN50P700X700X100_HS-49N - LAN7800/Y9X" 1420,820 r270 top
U3 "HD3SS3220IRNHT" "QFN40P250X450X80_HS-31N - HD3SS3220IRNHT" 490,1046.22 r90 top
U4 "93AA66CT-I/SN" "SOIC127P600X175-8N - 93AA66CT-I/SN" 970,980 r180 top
U5_LS2 "MIC2544-1YMM" "TSOP65P490X110-8N - MIC2544-1YMM" 3715,1125 r180 top (schematic designator U5)
U5_LS3 "MIC2544-1YMM" "TSOP65P490X110-8N - MIC2544-1YMM" 3397.6,1123.39 r180 top (schematic designator U5)
U5_LS4 "MIC2544-1YMM" "TSOP65P490X110-8N - MIC2544-1YMM" 2647.56,1141 r180 top (schematic designator U5)
U6 "MPM3610AGQV-P" MPM3610AGQV-P 335,320 r0 top
U7 "MPM3610AGQV-P" MPM3610AGQV-P 962.64,216.81 r0 top
Y1 "ABM8G-25.000MHZ-B4Y-T" ABM8G-25.000MHZ-B4Y-T 2933.66,220.43 r180 top
Y2 "ABM8G-25.000MHZ-B4Y-T" ABM8G-25.000MHZ-B4Y-T 1850,695 r90 top

## Footprints (in the part's own frame and the unit in brackets; to place one, negate y for a bottom-side part, rotate by r counter-clockwise, add the part's x,y. Pads: shape width x height; smd on the part's side, far side on the other; paste and mask are expansions set on the pad)
0483930003 [mm] "CONN RCPT USB3.0 TYPEA 9POS R/A"
  round 1.2 hole 0.7 unplated: 1(-3.5,-0.75) 2(-1,-0.75) 3(1,-0.75) 4(3.5,-0.75) 5(4,0.75) 6(2,0.75) 7(0,0.75) 8(-2,0.75) 9(-4,0.75)
  oval 1.1x2.2 hole 0.6 slot 1.7 at 90 deg unplated: SHD(-6.4,0) SHD(6.4,0)
  oval 1.1x1.9 hole 0.6 slot 1.4 at 90 deg unplated: SHD(-6.4,-8.5) SHD(6.4,-8.5)
  silkscreen extent -7,-7 7,2, body extent -6.9,-12.5 6.9,1.75, height 6.95
1054550101 [mm] "CONN RCP USB3.1 TYPEC 24P SMD RA"
  rect 0.3x0.7 smd: A1(-3,1.3) A2(-2.5,1.3) A3(-2,1.3) A4(-1.5,1.3) A5(-1,1.3) A6(-0.5,1.3) A7(0.5,1.3) A8(1,1.3) A9(1.5,1.3) A10(2,1.3) A11(2.5,1.3) A12(3,1.3) B2(2.25,0) B3(1.75,0) B4(1.25,0) B5(0.75,0) B6(0.25,0) B7(-0.25,0) B8(-0.75,0) B9(-1.25,0) B10(-1.75,0) B11(-2.25,0)
  rect 1x0.7 smd: B1(3.1,0) B12(-3.1,0)
  oval 1.1x2.6 hole 0.6 slot 2.1 at 90 deg unplated: SHD(-5.65,-4.47) SHD(5.65,-4.47)
  oval 1.1x2.1 hole 0.6 slot 1.6 at 90 deg unplated: SHD(-4.32,0.89) SHD(4.32,0.89)
  Keep-Out Layer board cut-out: -4.65,-6.5 -4.65,-1.5 -4.78,-1.47 -4.885,-1.387 -4.942,-1.267 -4.942,-1.133 -4.885,-1.013 -4.78,-0.93 -4.65,-0.9 -4.65,-0.9 4.65,-0.9 4.78,-0.93 4.885,-1.013 4.942,-1.133 4.942,-1.267 4.885,-1.387 4.78,-1.47 4.65,-1.5 4.65,-1.5 4.65,-6.5
  body extent -5.8,-6.57 5.8,1.33, height 2.17
7498111120R [mm] "CONN JACK 1PORT 1000 BASE-T SMD"
  rrect50% 0.71x3 smd: 1(-6.63,-3.5) 2(-5.61,-3.5) 3(-4.59,-3.5) 4(-3.57,-3.5) 5(-2.55,-3.5) 6(-1.53,-3.5) 7(-0.51,-3.5) 8(0.51,-3.5) 9(1.53,-3.5) 10(2.55,-3.5) 11(3.57,-3.5) 12(4.59,-3.5) 13(5.61,-3.5) 14(6.63,-3.5)
  round 0 hole 1.4 unplated: 16(-3.5,0) 17(3.5,0)
  rrect50% 1.4x3 smd: SHD(-8.725,10.2) SHD(8.725,10.2)
  Keep-Out Layer board cut-out: -7.825,5.194 -7.825,16.7 7.825,16.7 7.825,5.194 7.688,4.695 7.32,4.331 6.819,4.2 6.819,4.2 6.819,4.2 -6.819,4.2 -6.819,4.2 -7.32,4.331 -7.688,4.695 -7.825,5.194
  silkscreen extent -8.82,-5.8 8.82,8.2, body extent -9.07,-4.26 9.08,18.22, height 10.1
ABM8G-25.000MHZ-B4Y-T [mm] "CRYSTAL 25.0000MHZ 10PF SMD"
  rect 1.4x1.2 smd: 1(-1.1,-0.85) 3(1.1,0.85) GND(-1.1,0.85) GND(1.1,-0.85)
  silkscreen extent -1.9,-2.29 1.6,1.25, body extent -1.6,-1.24 1.6,1.24, height 0.99
CAP_SM0402_YAGEOCA2_N [mm] "Capacitor, Yageo CA Class2, SM0402, IPC Medium Density"
  rect 0.66x0.62 smd: 1(-0.44,0) 2(0.44,0)
  body extent -0.53,-0.28 0.53,0.27, height 0.55
CAP_SM0603_YAGEOCC2_N [mm] "Capacitor, Yageo CC Class2, SM0603, IPC Medium Density"
  rect 1x1 smd: 1(-0.727,0) 2(0.727,0)
  body extent -0.9,-0.5 0.9,0.5, height 0.9
CAP_SM0805_YAGEOCC2_N [mm] "Capacitor, Yageo CC Class2, SM0805, IPC Medium Density"
  rect 1.3x1.45 smd: 1(-0.927,0) 2(0.927,0)
  body extent -1.1,-0.72 1.1,0.72, height 1.45
CAP_SM1206_YAGEOCC2_N [mm] "Capacitor, Yageo CC Class2, SM1206, IPC Medium Density"
  rect 1.4x1.9 smd: 1(-1.527,0) 2(1.527,0)
  silkscreen extent -0.3,-0.85 0.3,0.85, body extent -1.75,-0.95 1.75,0.95, height 1.8
"CAPAE5543X61M - EEE-FT1E330AR" [mm] "Aluminum Electrolytic Capacitor, Body 4.30x4.30x6.10mm, IPC Low Density"
  rect 2.65x1.8 smd: 1(-2.2,0) 2(2.2,0)
  silkscreen extent -2.25,-2.25 2.25,2.25, body extent -2.75,-2.25 2.75,2.25, height 6.1
"DIOC1608X11N - SML-LXFM0603SUGCTR" [mm] "Chip Diode, 2-Leads, Body 1.60x0.80mm, IPC Medium Density"
  rect 0.95x1.05 smd: 1(-0.8,0) 2(0.8,0)
  silkscreen extent 1.44,-0.79 1.54,-0.69, body extent -0.93,-0.53 0.92,0.53, height 1.1
ESD8004MUTAG [mm]
  rect 0.25x0.5 smd: 1(-1,-0.4) 1(-1,0.4) 2(-0.5,-0.4) 2(-0.5,0.4) 4(0.5,-0.4) 4(0.5,0.4) 5(1,-0.4) 5(1,0.4)
  rect 0.45x0.5 smd: GND(0,-0.4) GND(0,0.4)
  silkscreen extent -1.63,-1.13 1.3,0.5, body extent -1.25,-0.62 1.25,0.63, height 0.65
HDR2X3 [mm] "Connector; Header; 3x2 Position"
  rect 1.5x1.5 hole 0.9: 1(0,0)
  round 1.5 hole 0.9: 2(0,2.54) 3(2.54,0) 4(2.54,2.54) 5(5.08,0) 6(5.08,2.54)
  silkscreen extent -1.27,-1.27 6.35,3.81
"Jumper SMD 2" [mm]
  rect 0.5x1 smd: 1(-0.4,0) 2(0.4,0)
  silkscreen extent -1.02,-0.76 1.02,0.76
MPM3610AGQV-P [mm] "DC DC CONVERTER 0.8-18.48V"
  rect 0.8x0.25 smd: 1(-1.4,1.55) 12(1.4,1.55)
  rect 1.1x0.25 smd: 2(-1.25,0.9) 3(-1.25,0.25) 10(1.25,0.25) 11(1.25,0.9)
  rect 0.25x0.25 smd: 4(-1,-0.5) 5(-1,-1.25) 6(-1,-2) 7(1,-2) 8(1,-1.25) 9(1,-0.5)
  rect 0.25x0.7 smd: 13(1.25,2.45) 14(0.75,2.45) 17(-0.75,2.45) 18(-1.25,2.45)
  rect 0.25x1.1 smd: 15(0.25,2.25) 16(-0.25,2.25)
  Component Side region: -0.7,-2.225 -0.7,-0.275 -1.8,-0.275 -1.8,-0.525 -1.2,-0.525 -1.2,-1.125 -1.8,-1.125 -1.8,-1.375 -1.2,-1.375 -1.2,-1.975 -1.8,-1.975 -1.8,-2.225
  Component Side region: 0.7,-2.225 0.7,-0.275 1.8,-0.275 1.8,-0.525 1.2,-0.525 1.2,-1.125 1.8,-1.125 1.8,-1.375 1.2,-1.375 1.2,-1.975 1.8,-1.975 1.8,-2.225
  Keep-Out Layer region: -0.575,0.18 0.575,0.18 0.575,0.97 -0.575,0.97
  silkscreen extent -2.45,1.8 -2.05,2.2, body extent -1.5,-2.5 1.5,2.5, height 1.58
"QFN40P250X450X80_HS-31N - HD3SS3220IRNHT" [mm] "QFN, 30-Leads, Body 2.50x4.50mm, Pitch 0.40mm, Thermal Pad 1.20x3.20mm, IPC Medium Density"
  oval 0.55x0.2 smd: 1(-1.325,1.8) 2(-1.325,1.4) 3(-1.325,1) 4(-1.325,0.6) 5(-1.325,0.2) 6(-1.325,-0.2) 7(-1.325,-0.6) 8(-1.325,-1) 9(-1.325,-1.4) 10(-1.325,-1.8) 16(1.325,-1.8) 17(1.325,-1.4) 18(1.325,-1) 19(1.325,-0.6) 20(1.325,-0.2) 21(1.325,0.2) 22(1.325,0.6) 23(1.325,1) 24(1.325,1.4) 25(1.325,1.8)
  oval 0.2x0.55 smd: 11(-0.8,-2.325) 12(-0.4,-2.325) 13(0,-2.325) 14(0.4,-2.325) 15(0.8,-2.325) 26(0.8,2.325) 27(0.4,2.325) 28(0,2.325) 29(-0.4,2.325) 30(-0.8,2.325)
  round 0 all layers, no hole: 31(-0.35,1.2) 31(-0.35,0) 31(-0.35,-1.2) 31(0.35,1.2) 31(0.35,0) 31(0.35,-1.2)
  rect 1.2x3.2 smd: 31(0,0)
  silkscreen extent -2.22,-2.45 1.45,2.45, body extent -1.3,-2.3 1.3,2.3, height 0.8
"QFN40P700X700X100_HS-57N - USB5744/2G" [mm] "QFN, 56-Leads, Body 7.00x7.00mm, Pitch 0.40mm, Thermal Pad 4.60x4.60mm, IPC Medium Density"
  oval 0.9x0.2 smd: 1(-3.375,2.6) 2(-3.375,2.2) 3(-3.375,1.8) 4(-3.375,1.4) 5(-3.375,1) 6(-3.375,0.6) 7(-3.375,0.2) 8(-3.375,-0.2) 9(-3.375,-0.6) 10(-3.375,-1) 11(-3.375,-1.4) 12(-3.375,-1.8) 13(-3.375,-2.2) 14(-3.375,-2.6) 29(3.375,-2.6) 30(3.375,-2.2) 31(3.375,-1.8) 32(3.375,-1.4) 33(3.375,-1) 34(3.375,-0.6) 35(3.375,-0.2) 36(3.375,0.2) 37(3.375,0.6) 38(3.375,1) 39(3.375,1.4) 40(3.375,1.8) 41(3.375,2.2) 42(3.375,2.6)
  oval 0.2x0.9 smd: 15(-2.6,-3.375) 16(-2.2,-3.375) 17(-1.8,-3.375) 18(-1.4,-3.375) 19(-1,-3.375) 20(-0.6,-3.375) 21(-0.2,-3.375) 22(0.2,-3.375) 23(0.6,-3.375) 24(1,-3.375) 25(1.4,-3.375) 26(1.8,-3.375) 27(2.2,-3.375) 28(2.6,-3.375) 43(2.6,3.375) 44(2.2,3.375) 45(1.8,3.375) 46(1.4,3.375) 47(1,3.375) 48(0.6,3.375) 49(0.2,3.375) 50(-0.2,3.375) 51(-0.6,3.375) 52(-1,3.375) 53(-1.4,3.375) 54(-1.8,3.375) 55(-2.2,3.375) 56(-2.6,3.375)
  rect 4.6x4.6 smd: 57(0,0)
  silkscreen extent -4.43,-3.65 3.65,3.65, body extent -3.5,-3.5 3.5,3.5, height 1
"QFN50P700X700X100_HS-49N - LAN7800/Y9X" [mm] "QFN, 48-Leads, Body 7.00x7.00mm, Pitch 0.50mm, Thermal Pad 5.30x5.30mm, IPC Medium Density"
  oval 0.95x0.25 smd: 1(-3.375,2.75) 2(-3.375,2.25) 3(-3.375,1.75) 4(-3.375,1.25) 5(-3.375,0.75) 6(-3.375,0.25) 7(-3.375,-0.25) 8(-3.375,-0.75) 9(-3.375,-1.25) 10(-3.375,-1.75) 11(-3.375,-2.25) 12(-3.375,-2.75) 25(3.375,-2.75) 26(3.375,-2.25) 27(3.375,-1.75) 28(3.375,-1.25) 29(3.375,-0.75) 30(3.375,-0.25) 31(3.375,0.25) 32(3.375,0.75) 33(3.375,1.25) 34(3.375,1.75) 35(3.375,2.25) 36(3.375,2.75)
  oval 0.25x0.95 smd: 13(-2.75,-3.375) 14(-2.25,-3.375) 15(-1.75,-3.375) 16(-1.25,-3.375) 17(-0.75,-3.375) 18(-0.25,-3.375) 19(0.25,-3.375) 20(0.75,-3.375) 21(1.25,-3.375) 22(1.75,-3.375) 23(2.25,-3.375) 24(2.75,-3.375) 37(2.75,3.375) 38(2.25,3.375) 39(1.75,3.375) 40(1.25,3.375) 41(0.75,3.375) 42(0.25,3.375) 43(-0.25,3.375) 44(-0.75,3.375) 45(-1.25,3.375) 46(-1.75,3.375) 47(-2.25,3.375) 48(-2.75,3.375)
  rect 5.3x5.3 smd: PAD(0,0)
  silkscreen extent -4.47,-3.7 3.7,3.7, body extent -3.55,-3.55 3.55,3.55, height 1
RCS-0C [mm] "1206 Test Point"
  rrect50% 1.8x3.4 smd: 1(0,0)
RES_SM0603_YAGEORC_N [mm] "Resistor, Yageo RC_L, SM0603, IPC Medium Density"
  rect 0.7x0.9 smd: 1(-0.827,0) 2(0.827,0)
  body extent -0.85,-0.45 0.85,0.45, height 0.55
"SODFL100X40-2N - ESD9C5.0ST5G" [mm] "SODFL, 2-Leads, Body 0.60x1.00mm, IPC Medium Density"
  rect 0.5x0.3 smd: 1(-0.5,0) 2(0.5,0)
  silkscreen extent -0.7,0.4 -0.6,0.5, body extent -0.42,-0.33 0.43,0.33, height 0.4
"SOIC127P600X175-8N - 93AA66CT-I/SN" [mm] "SOIC, 8-Leads, Body 4.90x3.90mm, Pitch 1.27mm, IPC Medium Density"
  oval 1.5x0.6 smd: 1(-2.7,1.905) 2(-2.7,0.635) 3(-2.7,-0.635) 4(-2.7,-1.905) 5(2.7,-1.905) 6(2.7,-0.635) 7(2.7,0.635) 8(2.7,1.905)
  silkscreen extent -2.83,-2.45 1.55,2.88, body extent -1.95,-2.45 1.95,2.45, height 1.75
"TSOP65P490X110-8N - MIC2544-1YMM" [mm] "TSOP, 8-Leads, Body 3.00x3.00mm, Pitch 0.65mm, IPC Medium Density"
  oval 1.35x0.5 smd: 1(-2.225,0.975) 2(-2.225,0.325) 3(-2.225,-0.325) 4(-2.225,-0.975) 5(2.225,-0.975) 6(2.225,-0.325) 7(2.225,0.325) 8(2.225,0.975)
  silkscreen extent -2.35,-1.55 1.15,1.9, body extent -1.55,-1.55 1.55,1.55, height 1.1

## Part data
C1 C4 C5 C6 C7 C8 C9 C10 C11 C14 C15 C16 C17 C36_LS2 C36_LS3 C36_LS4 C38 C39 C40 C42 C43 C44 C45 C46 C47 C49 C50 C51 C52 C57_AF2 C57_AF3 C57_AF4 C58 C67_AF2 C67_AF3 C67_AF4 C68: library part CC0603KRX7R9BB104, "CAP 100nF SM0603 X7R 50V YAGEO CC2", Manufacturer=Yageo, Package=0603, Supplier Part Number 1=1362556, Tolerance (%)=10, Voltage Rating (Volts)=50, Category=Capacitor, ComponentLink1Description="Manufacturer Website", ComponentLink1URL=http://www.yageo.com, Manufacturer Part Number=CC0603KRX7R9BB104, Supplier 1=Farnell, Supplier 2=Digi-Key, Supplier Part Number 2=311-1344-1-ND
C2 C3 C34 C35: library part CC0603JRNPO9BN100, "CAP 10pF SM0603 NPO 50V YAGEO CC2", Manufacturer=Yageo, Package=0603, Supplier Part Number 1=721967, Tolerance (%)=5, Voltage Rating (Volts)=50, Category=Capacitor, ComponentLink1Description="Manufacturer Website", ComponentLink1URL=http://www.yageo.com, Manufacturer Part Number=CC0603JRNPO9BN100, Supplier 1=Farnell, Supplier 2=Digi-Key, Supplier Part Number 2=311-1058-1-ND
C20 C21 C22 C23 C37 C41 C48 C53 C54: library part CC0805KKX7R8BB105, "CAP 1uF SM0805 X7R 25V YAGEO CC2", Manufacturer=Yageo, Package=0805, Supplier Part Number 1=1458903, Tolerance (%)=10, Voltage Rating (Volts)=25, Category=Capacitor, ComponentLink1Description="Manufacturer Website", ComponentLink1URL=http://www.yageo.com, Manufacturer Part Number=CC0805KKX7R8BB105, Supplier 1=Farnell, Supplier 2=Digi-Key, Supplier Part Number 2=311-1456-1-ND
C24 C25 C26 C27 C28 C29 C30 C31 C32 C33 C55 C56 C69 C70: library part CC0402KRX7R9BB104, "CAP 100nF SM0805 X7R 50V YAGEO CC2", Manufacturer=Yageo, Package=0402, Tolerance (%)=10, Voltage Rating (Volts)=50, Category=Capacitor, ComponentLink1Description="Manufacturer Website", ComponentLink1URL=http://www.yageo.com, Manufacturer Part Number=CC0402KRX7R9BB104, Supplier 2=Digi-Key, Supplier Part Number 2=311-3566-1-ND
C59 C60 C61 C62 C63 C64 C65 C66: library part CC0805KKX7R8BB225, "CAP 2u2F SM0805 X7R 25V YAGEO CC2", Manufacturer=Yageo, Package=0805, Supplier Part Number 1=1458904, Tolerance (%)=10, Voltage Rating (Volts)=25, Category=Capacitor, ComponentLink1Description="Manufacturer Website", ComponentLink1URL=http://www.yageo.com, Manufacturer Part Number=CC0805KKX7R8BB225, Supplier 1=Farnell, Supplier 2=Digi-Key
C71: library part CC1206KKX7RCBB222, "CAP 2200pF SM1206 X7R 1000V YAGEO CC2", Manufacturer=Yageo, Package=1206, Tolerance (%)=10, Voltage Rating (Volts)=1000, Category=Capacitor, ComponentLink1Description="Manufacturer Website", ComponentLink1URL=http://www.yageo.com, Manufacturer Part Number=CC1206KKX7RCBB222, Supplier 2=Farnell, Supplier Part Number 2=1284147RL
C72 C73 C74: "CAP ALUM 33UF 20% 25V SMD"
D1 D2 D3 D4_AF2 D4_AF3 D4_AF4 D5_AF2 D5_AF3 D5_AF4: "TVS DIODE 3.3VWM 8VC 10UDFN"
D6_AF2 D6_AF3 D6_AF4 D7: "TVS DIODE 5VWM SOD923"
D8 D9 D10 D11 D12: "LED GREEN CLEAR SMD"
J1: "CONN JACK 1PORT 1000 BASE-T SMD"
J2: "CONN RCP USB3.1 TYPEC 24P SMD RA"
J3 J4 J5: "CONN RCPT USB3.0 TYPEA 9POS R/A"
P1: "Header, 3-Pin, Dual row", LatestRevisionDate=17-Jul-2002, LatestRevisionNote="Re-released for DXP Platform.", Publisher="Altium Limited"
R1 R2 R8: library part RC0603FR-0710KL, "RES 10K SM0603 YAGEO RC_L", Manufacturer=Yageo, Package=0603, Power (Watts)=0.1, Resistance (Ohms)=10000, Supplier Part Number 1=9238603, Tolerance (%)=1, Category=Resistor, ComponentLink1Description="Manufacturer Website", ComponentLink1URL=http://www.yageo.com, Manufacturer Part Number=RC0603FR-0710KL, Supplier 1=Farnell, Supplier 2=Digi-Key, Supplier Part Number 2=311-10.0KHRCT-ND
R3 R4: library part RC0603FR-07200KL, "RES 200K SM0603 YAGEO RC_L", Manufacturer=Yageo, Package=0603, Power (Watts)=0.1, Resistance (Ohms)=200000, Tolerance (%)=1, Category=Resistor, ComponentLink1Description="Manufacturer Website", ComponentLink1URL=http://www.yageo.com, Manufacturer Part Number=RC0603FR-07200KL, Supplier 2=Digi-Key, Supplier Part Number 2=311-200KHRCT-ND
R5: library part RC0603FR-0739KL, "RES 39K SM0603 YAGEO RC_L", Manufacturer=Yageo, Package=0603, Power (Watts)=0.1, Resistance (Ohms)=39000, Supplier Part Number 1=9238670, Tolerance (%)=1, Category=Resistor, ComponentLink1Description="Manufacturer Website", ComponentLink1URL=http://www.yageo.com, Manufacturer Part Number=RC0603FR-0739KL, Supplier 1=Farnell, Supplier 2=Digi-Key, Supplier Part Number 2=311-39.0KHRCT-ND
R6 R14 R17 R18: library part RC0603FR-0712KL, "RES 12K SM0603 YAGEO RC_L", Manufacturer=Yageo, Package=0603, Power (Watts)=0.1, Resistance (Ohms)=12000, Supplier Part Number 1=9238611, Tolerance (%)=1, Category=Resistor, ComponentLink1Description="Manufacturer Website", ComponentLink1URL=http://www.yageo.com, Manufacturer Part Number=RC0603FR-0712KL, Supplier 1=Farnell, Supplier 2=Digi-Key, Supplier Part Number 2=311-12.0KHRCT-ND
R7: library part RC0603FR-0782KL, "RES 82K SM0603 YAGEO RC_L", Manufacturer=Yageo, Package=0603, Power (Watts)=0.1, Resistance (Ohms)=82000, Supplier Part Number 1=9238719, Tolerance (%)=1, Category=Resistor, ComponentLink1Description="Manufacturer Website", ComponentLink1URL=http://www.yageo.com, Manufacturer Part Number=RC0603FR-0782KL, Supplier 1=Farnell, Supplier 2=Digi-Key, Supplier Part Number 2=311-82.0KHRCT-ND
R11: library part RC0603FR-07220KL, "RES 220K SM0603 YAGEO RC_L", Manufacturer=Yageo, Package=0603, Power (Watts)=0.1, Resistance (Ohms)=220000, Supplier Part Number 1=9238760, Tolerance (%)=1, Category=Resistor, ComponentLink1Description="Manufacturer Website", ComponentLink1URL=http://www.yageo.com, Manufacturer Part Number=RC0603FR-07220KL, Supplier 1=Farnell, Supplier 2=Digi-Key, Supplier Part Number 2=311-220KHRCT-ND
R12: library part RC0603FR-07909KL, "RES 909K SM0603 YAGEO RC_L", Manufacturer=Yageo, Package=0603, Power (Watts)=0.1, Resistance (Ohms)=909000, Tolerance (%)=1, Category=Resistor, ComponentLink1Description="Manufacturer Website", ComponentLink1URL=http://www.yageo.com, Manufacturer Part Number=RC0603FR-07909KL, Supplier 2=Digi-Key, Supplier Part Number 2=311-909KHRCT-ND
R13_LS2 R13_LS3 R13_LS4: library part RC0603FR-07270RL, "RES 270R SM0603 YAGEO RC_L", Manufacturer=Yageo, Package=0603, Power (Watts)=0.1, Resistance (Ohms)=270, Supplier Part Number 1=9238417, Tolerance (%)=1, Category=Resistor, ComponentLink1Description="Manufacturer Website", ComponentLink1URL=http://www.yageo.com, Manufacturer Part Number=RC0603FR-07270RL, Supplier 1=Farnell, Supplier 2=Digi-Key, Supplier Part Number 2=311-270HRCT-ND
R15 R16: library part RC0603FR-071KL, "RES 1K SM0603 YAGEO RC_L", Manufacturer=Yageo, Package=0603, Power (Watts)=0.1, Resistance (Ohms)=1000, Supplier Part Number 1=9238484, Tolerance (%)=1, Category=Resistor, ComponentLink1Description="Manufacturer Website", ComponentLink1URL=http://www.yageo.com, Manufacturer Part Number=RC0603FR-071KL, Supplier 1=Farnell, Supplier 2=Digi-Key, Supplier Part Number 2=311-1.00KHRCT-ND
R19_AF2 R19_AF3 R19_AF4 R20: library part RC0603FR-07330RL, "RES 330R SM0603 YAGEO RC_L", Manufacturer=Yageo, Package=0603, Power (Watts)=0.1, Resistance (Ohms)=330, Supplier Part Number 1=9238425, Tolerance (%)=1, Category=Resistor, ComponentLink1Description="Manufacturer Website", ComponentLink1URL=http://www.yageo.com, Manufacturer Part Number=RC0603FR-07330RL, Supplier 1=Farnell, Supplier 2=Digi-Key, Supplier Part Number 2=311-330HRCT-ND
R21: library part RC0603FR-0768KL, "RES 68K SM0603 YAGEO RC_L", Manufacturer=Yageo, Package=0603, Power (Watts)=0.1, Resistance (Ohms)=68000, Supplier Part Number 1=9238700, Tolerance (%)=1, Category=Resistor, ComponentLink1Description="Manufacturer Website", ComponentLink1URL=http://www.yageo.com, Manufacturer Part Number=RC0603FR-0768KL, Supplier 1=Farnell, Supplier 2=Digi-Key, Supplier Part Number 2=311-68.0KHRCT-ND
R22: library part RC0603FR-0722KL, "RES 22K SM0603 YAGEO RC_L", Manufacturer=Yageo, Package=0603, Power (Watts)=0.1, Resistance (Ohms)=22000, Supplier Part Number 1=9238646, Tolerance (%)=1, Category=Resistor, ComponentLink1Description="Manufacturer Website", ComponentLink1URL=http://www.yageo.com, Manufacturer Part Number=RC0603FR-0722KL, Supplier 1=Farnell, Supplier 2=Digi-Key, Supplier Part Number 2=311-22.0KHRCT-ND
R23: library part RC0603FR-0756KL, "RES 56K SM0603 YAGEO RC_L", Manufacturer=Yageo, Package=0603, Power (Watts)=0.1, Resistance (Ohms)=56000, Supplier Part Number 1=9238697, Tolerance (%)=1, Category=Resistor, ComponentLink1Description="Manufacturer Website", ComponentLink1URL=http://www.yageo.com, Manufacturer Part Number=RC0603FR-0756KL, Supplier 1=Farnell, Supplier 2=Digi-Key, Supplier Part Number 2=311-56KHRCT-ND
R24 R27 R28 R29 R30: library part RC0603FR-07120KL, "RES 120K SM0603 YAGEO RC_L", Manufacturer=Yageo, Package=0603, Power (Watts)=0.1, Resistance (Ohms)=120000, Supplier Part Number 1=9238735, Tolerance (%)=1, Category=Resistor, ComponentLink1Description="Manufacturer Website", ComponentLink1URL=http://www.yageo.com, Manufacturer Part Number=RC0603FR-07120KL, Supplier 1=Farnell, Supplier 2=Digi-Key, Supplier Part Number 2=311-120KHRCT-ND
R25 R26: library part RC0603FR-07220RL, "RES 220R SM0603 YAGEO RC_L", Manufacturer=Yageo, Package=0603, Power (Watts)=0.1, Resistance (Ohms)=220, Supplier Part Number 1=2421863, Tolerance (%)=1, Category=Resistor, ComponentLink1Description="Manufacturer Website", ComponentLink1URL=http://www.yageo.com, Manufacturer Part Number=RC0603FR-07220RL, Supplier 1=Farnell, Supplier 2=Digi-Key, Supplier Part Number 2=311-220HRCT-ND
R31 R32 R33 R34 R35: library part RC0603FR-071K5L, "RES 1K5 SM0603 YAGEO RC_L", Manufacturer=Yageo, Package=0603, Power (Watts)=0.1, Resistance (Ohms)=1500, Supplier Part Number 1=9238506, Tolerance (%)=1, Category=Resistor, ComponentLink1Description="Manufacturer Website", ComponentLink1URL=http://www.yageo.com, Manufacturer Part Number=RC0603FR-071K5L, Supplier 1=Farnell, Supplier 2=Digi-Key, Supplier Part Number 2=311-1.50KHRCT-ND
U1: "IC HUB CTLR USB 56VQFN"
U2: "IC ETHERNET CTLR USB 48SQFN 7x7"
U3: "USB TYPE-C DRP PORT CONTROLLER W"
U4: "IC EEPROM 4KBIT MICROWIRE 8SOIC"
U5_LS2 U5_LS3 U5_LS4: "IC PWR SWITCH N-CHAN 1:1 8MSOP"
U6 U7: "DC DC CONVERTER 0.8-18.48V"
Y1 Y2: "CRYSTAL 25.0000MHZ 10PF SMD"

## Via types
v1: diameter 14, hole 10, Component Side to Solder Side, 157 vias
v2: diameter 12, hole 8, Component Side to Solder Side, 43 vias
v3: diameter 19.68, hole 7.87, Component Side to Solder Side, 41 vias

## Nets (pads, with @x,y where several pads share a name; then routed paths per layer and width w, separated by ;. In a path a pad name is that pad's centre, name@x,y a point inside that pad or via, vN(x,y) a via of type N, cw(c..) or ccw(c..) an arc to the next point about the centre after c; other vN are vias at no path point)
CC1: D3.5 J2.A5 U3.2 | length 655
  Component Side w6: v2(434.88,957.32) U3.2@434.88,994.06 ; v2(560,1240) 599.37,1279.37 D3.5@599.37,1349.25 D3.5@599.37,1380.75 599.01,1381.1 J2.A5@599.01,1486.66
  Solder Side w6: v2(434.88,957.32) 410,982.2 410,1090 v2(560,1240)
CC2: D3.1 J2.B5 U3.1 | length 678.8
  Component Side w6: v2(400,957.44) 419.13,976.57 U3.1@419.13,994.06 ; v2(495,1300) 520.63,1325.63 D3.1@520.63,1349.25 D3.1@520.63,1380.75 v2(520.63,1410.63) ; v2(530,1515) 530,1537.72 J2.B5@530.12,1537.84
  Solder Side w6: v2(400,957.44) 400,1145 495,1240 v2(495,1300) ; v2(520.63,1410.63) 520.63,1465.63 529.96,1474.96 v2(530,1515) v2(530,1515)
DFP1_D_N: U1.2 U2.27 | length 3415.5
  Component Side w6: U2.27@1351.1,687.13 1351.1,665.43 1347.26,661.58 1347.26,605.29 1310,568.03 1310,470 1450,330 2460,330 2735,55 3233.03,55 3419.62,241.59 3419.62,635.38 3430,645.76 v1(3430,650) ; U1.2@3079.84,615.35 3123.87,615.35 v1(3125,616.48)
  Solder Side w6: v1(3125,616.48) 3128,613.48 3145,613.48 3171.52,640 3210,640 3225,640 3240,640 cw(c3247.5,640) 3255,640 3270,640 cw(c3277.5,640) 3285,640 3300,640 cw(c3307.5,640) 3315,640 3330,640 cw(c3337.5,640) 3345,640 3360,640 cw(c3367.5,640) 3375,640 3390,640 3395,640 3420,640 v1(3430,650)
DFP1_D_P: U1.1 U2.26 | length 3414.9
  Component Side w6: U2.26@1331.42,687.13 1331.42,665.43 1335.26,661.58 1335.26,610.26 1298,573 1298,465.03 1390.03,373 1445.03,318 2455.03,318 2730.03,43 3238,43 3431.62,236.62 3431.62,630.41 3438.49,637.27 v1(3442.73,637.27) ; U1.1@3079.84,599.61 3123.87,599.61 v1(3125,598.48)
  Solder Side w6: v1(3125,598.48) 3128,601.48 3149.97,601.48 3176.49,628 3433.46,628 v1(3442.73,637.27)
DFP1_RXa_N: C56.1 U1.7 | length 3007.5
  Component Side w6: C56.1@1355,517.68 1374,498.68 1374,444.03 1460.03,358 2477,358 2752,83 3188,83 3393.97,288.97 3393.97,611.94 3313.69,692.22 3102.43,692.22 3100.56,694.09 U1.7@3079.84,694.09
DFP1_RXa_P: C55.1 U1.6 | length 3007.8
  Component Side w6: C55.1@1405,517.68 1386,498.68 1386,449 1465,370 1490,370 cw(c1497.5,370) 1505,370 1520,370 cw(c1527.5,370) 1535,370 1550,370 cw(c1557.5,370) 1565,370 1580,370 cw(c1587.5,370) 1595,370 1610,370 cw(c1617.5,370) 1625,370 1640,370 cw(c1647.5,370) 1655,370 1670,370 cw(c1677.5,370) 1685,370 1700,370 1710,370 2481.97,370 2756.97,95 3183.03,95 3381.97,293.94 3381.97,606.97 3308.72,680.22 3102.43,680.22 3100.56,678.35 U1.6@3079.84,678.35
DFP1_RXb_N: C56.2 U2.28 | length 144.5
  Component Side w6: C56.2@1355,552.32 1355,568.32 1374.63,587.94 1374.63,661.58 1370.79,665.43 U2.28@1370.79,687.13
DFP1_RXb_P: C55.2 U2.29 | length 144
  Component Side w6: U2.29@1390.47,687.13 1390.47,665.43 1386.63,661.58 1386.63,586.69 1405,568.32 C55.2@1405,552.32
DFP1_TXa_N: C26.1 U1.4 | length 362.2
  Component Side w6: U1.4@3079.84,646.85 3100.56,646.85 3102.43,644.98 3150.96,644.98 3221.97,573.97 3258.44,573.97 3335.47,496.94 3335.47,475.79 C26.1@3351.97,459.29
DFP1_TXa_P: C24.1 U1.3 | length 362.9
  Component Side w6: U1.3@3079.84,631.1 3100.56,631.1 3102.43,632.98 3145.99,632.98 3217,561.97 3253.47,561.97 3259.38,556.06 3272.1,543.33 ccw(c3278.47,536.97) 3284.83,530.61 3297.56,517.88 ccw(c3303.92,511.51) 3310.29,505.15 3315.44,500 3323.47,491.97 3323.47,475.79 C24.1@3306.97,459.29
DFP1_TXb_N: C26.2 U2.31 | length 2396
  Component Side w6: U2.31@1429.84,687.13 1429.84,665.43 1433.68,661.58 1433.68,591.32 1502,523 1565.03,523 1690.03,398 2502,398 2778.49,121.51 3151.51,121.51 3335.47,305.47 3335.47,408.15 C26.2@3351.97,424.65
DFP1_TXb_P: C24.2 U2.32 | length 2395
  Component Side w6: U2.32@1449.53,687.13 1449.53,665.43 1445.68,661.58 1445.68,596.29 1506.97,535 1570,535 1695,410 2506.97,410 2783.46,133.51 3146.54,133.51 3209.01,195.99 3218.83,205.8 cw(c3224.84,211.81) 3230.85,217.82 3242.88,229.85 cw(c3248.89,235.86) 3254.9,241.87 3266.92,253.89 cw(c3272.93,259.9) 3278.94,265.91 3290.96,277.93 cw(c3296.97,283.94) 3302.98,289.95 3315,301.97 3323.47,310.44 3323.47,408.15 C24.2@3306.97,424.65
DFP2_D_N: D5_AF2.4 J3.2 U1.9 | length 2336.9
  Component Side w6: U1.9@3079.84,725.59 3100.56,725.59 3102.43,723.72 3803.72,723.72 3985,905 3985,1308.03 3883.53,1409.5 3883.53,1667.57 3879.68,1671.41 D5_AF2.4@3879.68,1684.25 ; J3.2@3748.62,1883.11 3715.25,1916.48 3715.25,1935.25 3723,1943 3730,1943 3741.5,1943 3753,1943 cw(c3753,1931.5) 3764.5,1931.5 3764.5,1929.5 ccw(c3776,1929.5) 3776,1918 ccw(c3776,1929.5) 3787.5,1929.5 3787.5,1931.5 cw(c3799,1931.5) 3799,1943 cw(c3799,1931.5) 3810.5,1931.5 3810.5,1929.5 ccw(c3822,1929.5) 3822,1918 ccw(c3822,1929.5) 3833.5,1929.5 3833.5,1936.5 cw(c3840,1936.5) 3840,1943 3860.03,1943 3905,1898.03 3905,1795 3883.53,1773.53 3883.53,1732.43 3879.68,1728.59 D5_AF2.4@3879.68,1715.75
DFP2_D_P: D5_AF2.5 J3.3 U1.8 | length 2333.9
  Component Side w6: U1.8@3079.84,709.84 3100.56,709.84 3102.43,711.72 3808.69,711.72 3997,900.03 3997,1313 3895.53,1414.47 3895.53,1667.57 3899.37,1671.41 D5_AF2.5@3899.37,1684.25 ; J3.3@3669.88,1883.11 3703.25,1916.48 3703.25,1940.22 3718.03,1955 3865,1955 3917,1903 3917,1790.03 3895.53,1768.56 3895.53,1732.43 3899.37,1728.59 D5_AF2.5@3899.37,1715.75
DFP2_RX_N: D4_AF2.1 J3.5 U1.14 | length 1843.1
  Component Side w6: U1.14@3079.84,804.33 3100.56,804.33 3102.43,802.46 3125.49,802.46 3218.03,895 3770,895 3891.51,1016.51 3891.51,1231.51 3696.51,1426.51 3693.18,1429.85 3684.7,1438.33 3678.64,1444.39 ccw(c3676.21,1441.97) 3673.79,1444.39 cw(c3669.55,1448.64) 3665.31,1444.39 cw(c3669.55,1448.64) 3665.31,1452.88 ccw(c3662.88,1455.3) 3665.31,1457.72 3661.66,1461.37 ccw(c3659.24,1458.94) 3656.82,1461.36 cw(c3652.58,1465.61) 3648.34,1461.37 cw(c3652.58,1465.61) 3648.34,1469.85 ccw(c3645.91,1472.27) 3648.34,1474.69 3642.27,1480.76 3638.03,1485 3613,1510.03 3613,1616.5 3584.47,1645.03 3584.47,1667.57 3580.63,1671.41 D4_AF2.1@3580.63,1684.25 ; J3.5@3551.77,1824.06 3585.14,1790.69 3585.14,1733.1 3580.63,1728.59 D4_AF2.1@3580.63,1715.75
DFP2_RX_P: D4_AF2.2 J3.6 U1.13 | length 1841
  Component Side w6: U1.13@3079.84,788.58 3100.56,788.58 3102.43,790.46 3130.46,790.46 3223,883 3774.97,883 3903.51,1011.54 3903.51,1236.49 3900,1240 3625,1515 3625,1621.47 3596.47,1650 3596.47,1667.57 3600.32,1671.41 D4_AF2.2@3600.32,1684.25 ; D4_AF2.2@3600.32,1715.75 3600.32,1728.59 3597.14,1731.76 3597.14,1790.69 J3.6@3630.51,1824.06
DFP2_TXa_N: C29.1 U1.11 | length 1650
  Component Side w6: U1.11@3079.84,757.09 3100.56,757.09 3102.43,755.21 3740.21,755.21 3936.51,951.51 3936.51,1276.51 3820.71,1392.32 3820.71,1427.81 3820.71,1446.81 3820.71,1465.81 cw(c3820.71,1475.31) 3820.71,1484.81 3820.71,1503.81 cw(c3820.71,1513.31) 3820.71,1522.81 3820.71,1541.81 3820.71,1555 3820.71,1569.73 C29.1@3804.21,1586.23
DFP2_TXa_P: C28.1 U1.10 | length 1648.2
  Component Side w6: U1.10@3079.84,741.34 3100.56,741.34 3102.43,743.21 3745.18,743.21 3948.51,946.54 3948.51,1281.49 3945,1285 3832.71,1397.29 3832.71,1569.73 C28.1@3849.21,1586.23
DFP2_TXb_N: C29.2 D5_AF2.1 J3.8 | length 204.2
  Component Side w6: J3.8@3787.99,1824.06 3802.3,1824.06 3821.36,1805 3821.36,1729.32 3820.63,1728.59 D5_AF2.1@3820.63,1715.75 ; C29.2@3804.21,1620.87 3824.47,1641.13 3824.47,1667.57 3820.63,1671.41 D5_AF2.1@3820.63,1684.25
DFP2_TXb_P: C28.2 D5_AF2.2 J3.9 | length 203.6
  Component Side w6: D5_AF2.2@3840.32,1684.25 3840.32,1671.41 3836.47,1667.57 3836.47,1649.61 3849.21,1636.87 C28.2@3849.21,1620.87 ; D5_AF2.2@3840.32,1715.75 3840.32,1728.59 3833.36,1735.54 3833.36,1805 3852.42,1824.06 J3.9@3866.73,1824.06
DFP3_D_N: D5_AF3.4 J4.2 U1.18 | length 1416.5
  Component Side w6: J4.2@2961.22,1883.11 2927.85,1916.48 2927.85,1937.85 2935,1945 2945,1945 2954.5,1945 2964,1945 cw(c2964,1935.5) 2973.5,1935.5 2973.5,1926.46 ccw(c2983,1926.46) 2983,1916.96 ccw(c2983,1926.46) 2992.5,1926.46 2992.5,1935.5 cw(c3002,1935.5) 3002,1945 3090,1945 3120,1915 3120,1795 3101.49,1776.49 3098.53,1773.53 3098.53,1732.43 3094.68,1728.59 D5_AF3.4@3094.68,1715.75 ; U1.18@3002.09,834.84 3002.09,855.56 3003.96,857.43 3003.96,910.93 3018,924.97 3018,1083 3098.53,1163.53 3098.53,1667.57 3094.68,1671.41 D5_AF3.4@3094.68,1684.25
DFP3_D_P: D5_AF3.5 J4.3 U1.17 | length 1416.5
  Component Side w6: J4.3@2882.48,1883.11 2915.85,1916.48 2915.85,1942.82 2926.51,1953.49 2930.03,1957 3094.97,1957 3098.49,1953.49 3132,1919.97 3132,1790.03 3110.53,1768.56 3110.53,1732.43 3114.37,1728.59 D5_AF3.5@3114.37,1715.75 ; U1.17@3017.83,834.84 3017.83,855.56 3015.96,857.43 3015.96,905.96 3030,920 3030,1078.03 3110.53,1158.56 3110.53,1667.57 3114.37,1671.41 D5_AF3.5@3114.37,1684.25
DFP3_RX_N: D4_AF3.1 J4.5 U1.23 | length 1028.3
  Component Side w6: J4.5@2764.37,1824.06 2798.84,1789.58 2798.84,1733.18 2795,1729.34 D4_AF3.1@2795,1716.5 ; D4_AF3.1@2795,1685 2795,1672.16 2798.84,1668.31 2798.84,1619.19 2871.49,1546.54 2871.49,993.51 2875,990 2925.22,939.78 2925.22,857.43 2923.35,855.56 U1.23@2923.35,834.84
DFP3_RX_P: D4_AF3.2 J4.6 U1.22 | length 1027.4
  Component Side w6: D4_AF3.2@2814.69,1685 2814.69,1672.16 2810.84,1668.32 2810.84,1624.16 2883.49,1551.51 2883.49,998.49 2937.22,944.75 2937.22,857.43 2939.09,855.56 U1.22@2939.09,834.84 ; D4_AF3.2@2814.69,1716.5 2814.69,1729.34 2810.84,1733.18 2810.84,1791.79 J4.6@2843.11,1824.06
DFP3_TXa_N: C31.1 U1.20 | length 792
  Component Side w6: U1.20@2970.59,834.84 2970.59,855.56 2972.46,857.43 2972.46,929.44 2989.97,946.94 2989.97,1149.97 3036.5,1196.5 3036.5,1576.18 C31.1@3020,1592.68
DFP3_TXa_P: C30.1 U1.19 | length 792
  Component Side w6: U1.19@2986.34,834.84 2986.34,855.56 2984.46,857.43 2984.46,924.46 3001.97,941.97 3001.97,1145 3048.5,1191.53 3048.5,1576.18 C30.1@3065,1592.68
DFP3_TXb_N: C31.2 D5_AF3.1 J4.8 | length 189.4
  Component Side w6: J4.8@3000.59,1824.06 3039.47,1785.18 3039.47,1732.43 3035.63,1728.59 D5_AF3.1@3035.63,1715.75 ; C31.2@3020,1627.32 3035.63,1642.95 D5_AF3.1@3035.63,1684.25
DFP3_TXb_P: C30.2 D5_AF3.2 J4.9 | length 185.6
  Component Side w6: D5_AF3.2@3055.32,1684.25 3055.32,1671.41 3051.47,1667.57 3051.47,1640.85 C30.2@3065,1627.32 ; D5_AF3.2@3055.32,1715.75 3055.32,1728.59 3051.47,1732.43 3051.47,1796.2 J4.9@3079.33,1824.06
DFP4_D_N: D5_AF4.4 J5.2 U1.25 | length 1371.8
  Component Side w6: J5.2@2174.41,1379.56 2141.04,1412.93 2141.04,1431.04 2155,1445 2160,1445 2169.5,1445 2179,1445 cw(c2179,1435.5) 2188.5,1435.5 2188.5,1426.46 ccw(c2198,1426.46) 2198,1416.96 ccw(c2198,1426.46) 2207.5,1426.46 2207.5,1435.5 cw(c2217,1435.5) 2217,1445 2280,1445 2335,1390 2335,1300 2313.21,1278.21 2313.21,1226.69 2309.37,1222.84 D5_AF4.4@2309.37,1210 ; D5_AF4.4@2309.37,1178.5 2309.37,1165.66 2313.21,1161.82 2313.21,1044.82 2351.51,1006.51 2360.03,998 2815.94,998 2893.72,920.21 2893.72,857.43 2891.85,855.56 U1.25@2891.85,834.84
DFP4_D_P: D5_AF4.5 J5.3 U1.24 | length 1371.8
  Component Side w6: J5.3@2095.67,1379.56 2129.04,1412.93 2129.04,1436.01 2150.03,1457 2284.97,1457 2347,1394.97 2347,1295.03 2325.21,1273.24 2325.21,1226.68 2329.06,1222.84 D5_AF4.5@2329.06,1210 ; D5_AF4.5@2329.06,1178.5 2329.06,1165.66 2325.21,1161.82 2325.21,1049.79 2365,1010 2820.91,1010 2868.94,961.97 2905.72,925.18 2905.72,857.43 2907.6,855.56 U1.24@2907.6,834.84
DFP4_RX_N: D4_AF4.1 J5.5 U1.30 | length 1114.3
  Component Side w6: J5.5@1977.56,1320.51 1990.42,1320.51 2010.93,1300 2010.93,1223.89 2010.63,1223.59 D4_AF4.1@2010.63,1210.75 ; D4_AF4.1@2010.63,1179.25 2010.63,1166.41 2014.47,1162.57 2014.47,1145.03 2271.5,888 2470,888 2567.54,790.46 2791.5,790.46 2793.38,788.58 U1.30@2814.09,788.58
DFP4_RX_P: D4_AF4.2 J5.6 U1.29 | length 1114.5
  Component Side w6: D4_AF4.2@2030.32,1179.25 2030.32,1166.41 2026.47,1162.57 2026.47,1150 2036.47,1140 ccw(c2041.78,1145.3) 2047.08,1140 cw(c2052.38,1134.7) 2057.69,1140 cw(c2052.38,1134.7) 2057.69,1129.39 ccw(c2062.99,1124.09) 2057.69,1118.79 2105.74,1070.74 2276.47,900 2474.97,900 2572.51,802.46 2791.5,802.46 2793.38,804.33 U1.29@2814.09,804.33 ; D4_AF4.2@2030.32,1210.75 2030.32,1223.59 2022.93,1230.98 2022.93,1300 2043.44,1320.51 J5.6@2056.3,1320.51
DFP4_TXa_N: C33.1 U1.27 | length 773.4